# Altium PCB o_core_v1.PcbDoc (part 1 of 2)
Units mm, origin at the board's own origin, x right, y up, seen from the top; angles counter-clockwise.
Board outline 104 x 81 mm, 4 copper layers (Top Layer, GND_Layer, MidLayer2, Bottom Layer); 166 components, 151 nets, 748 pads, 250 vias.
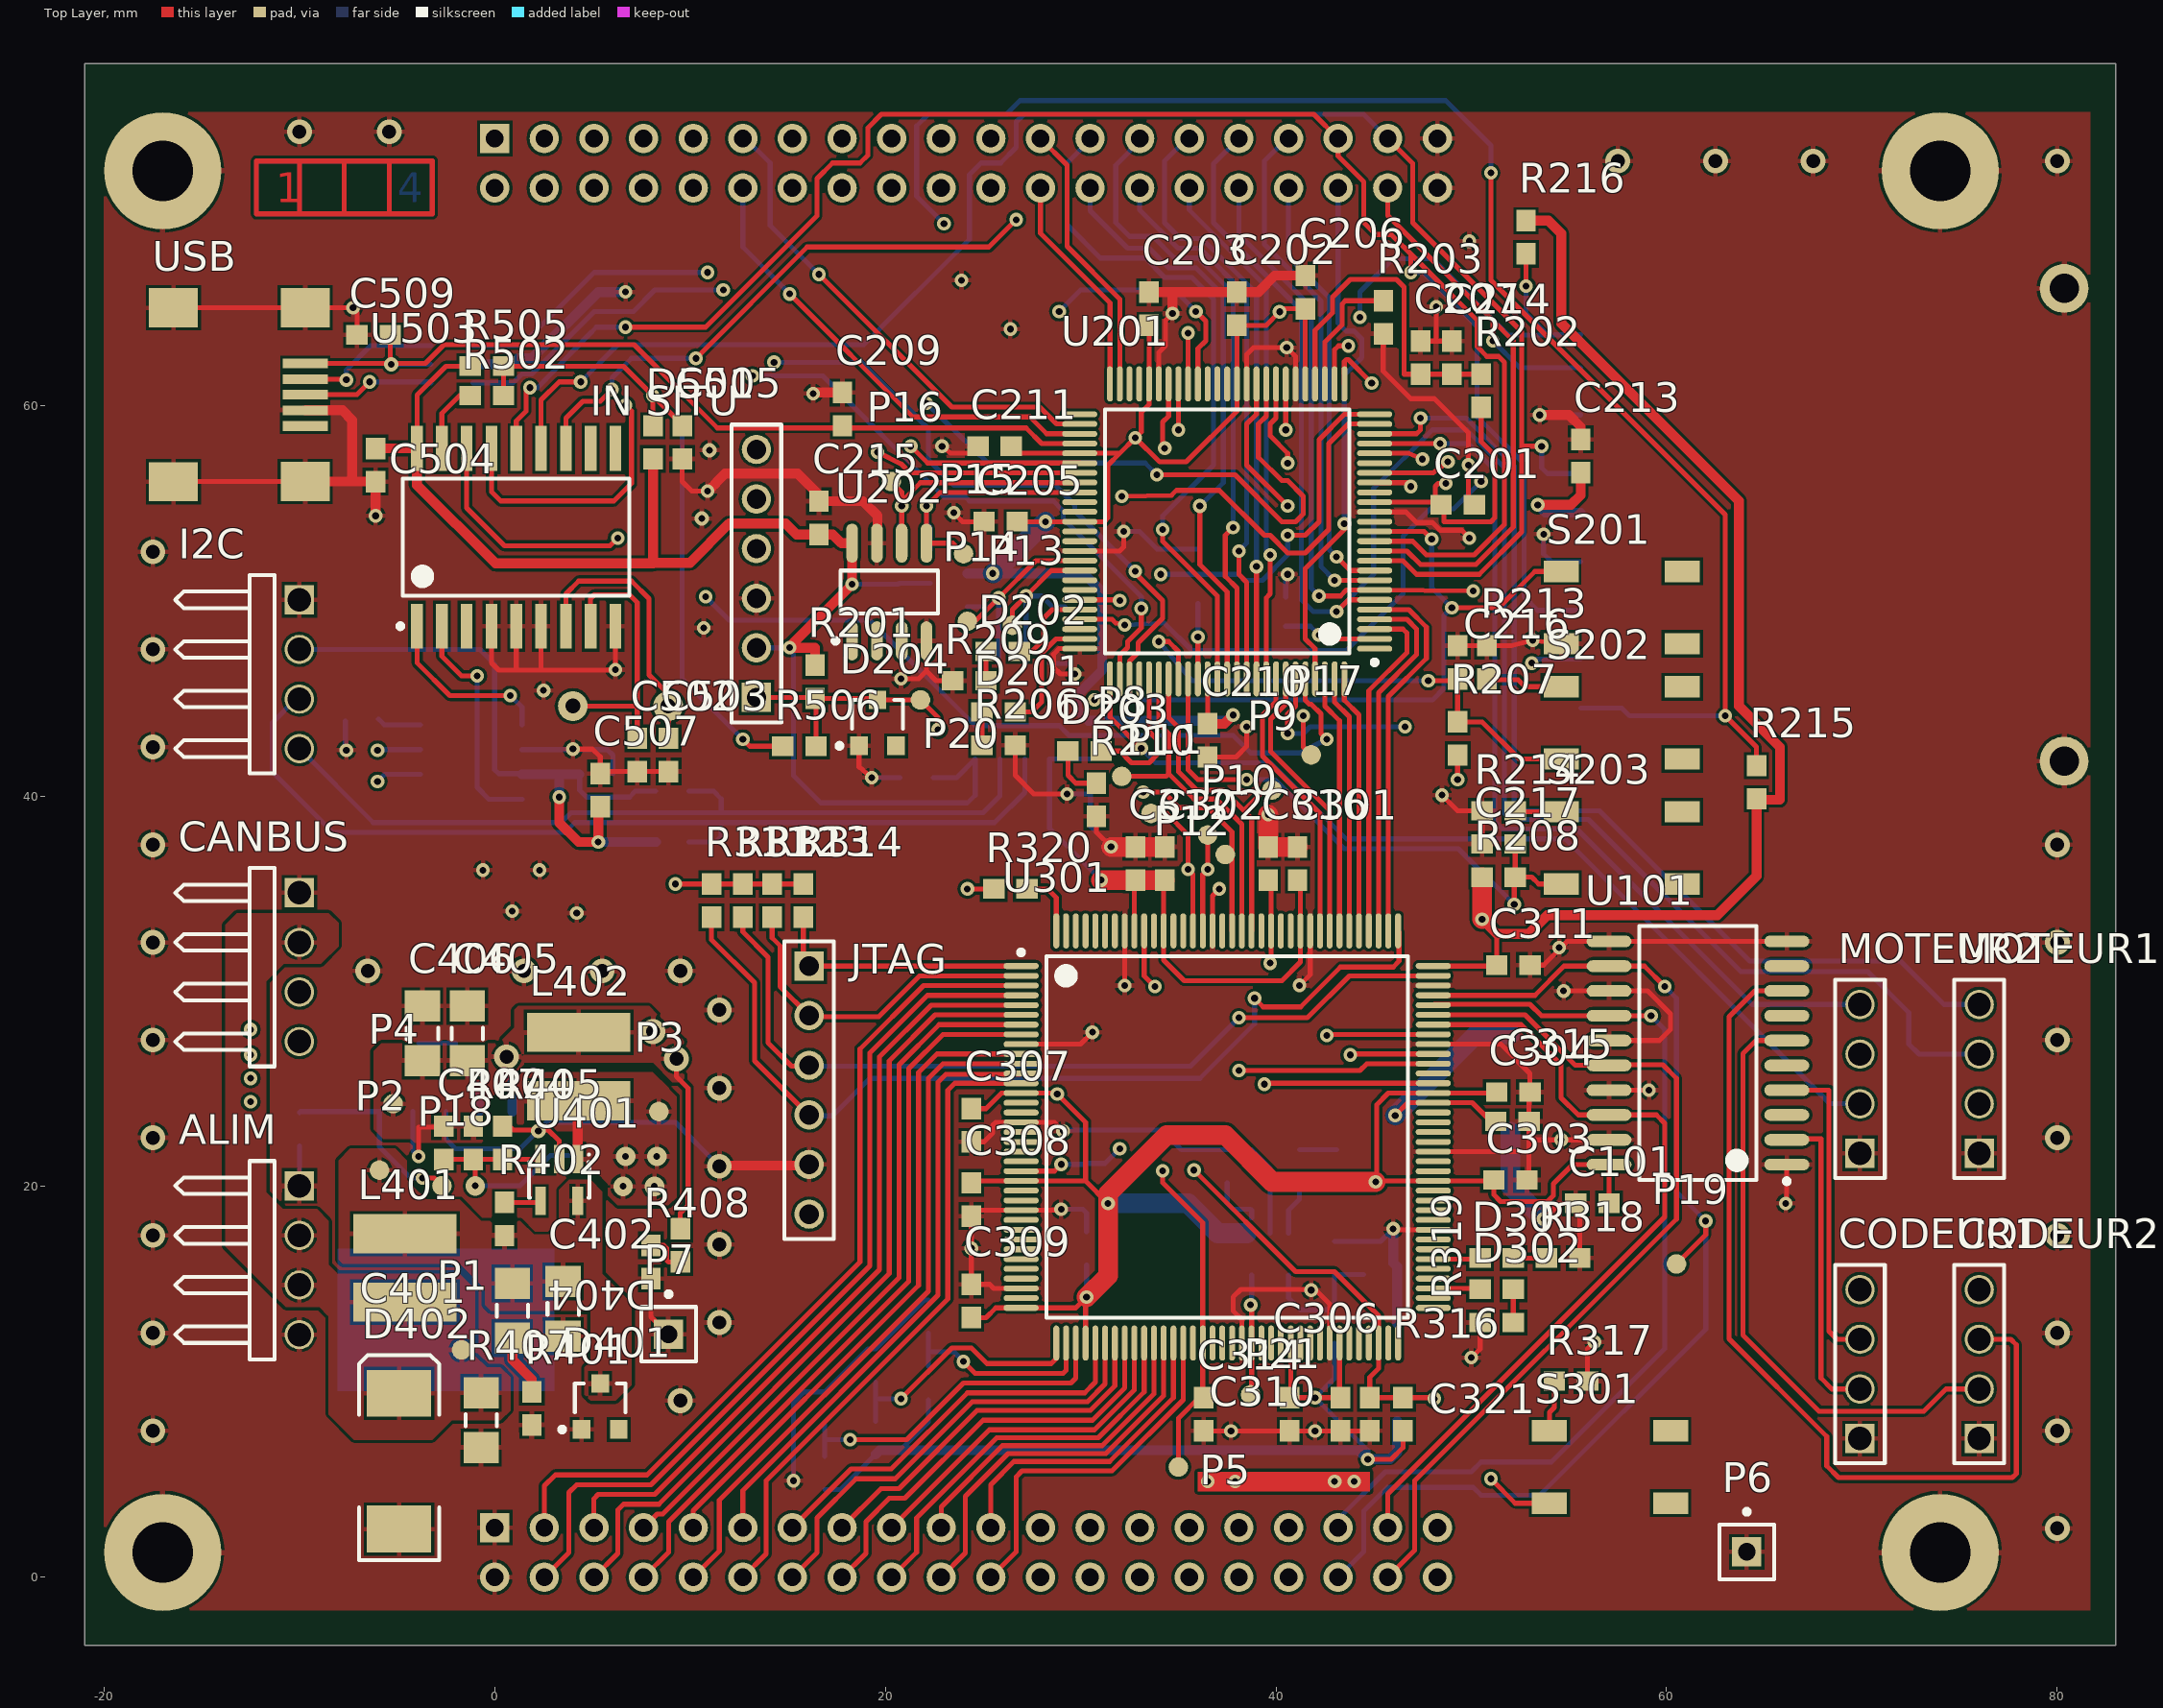
[diagram p0: Top Layer view]
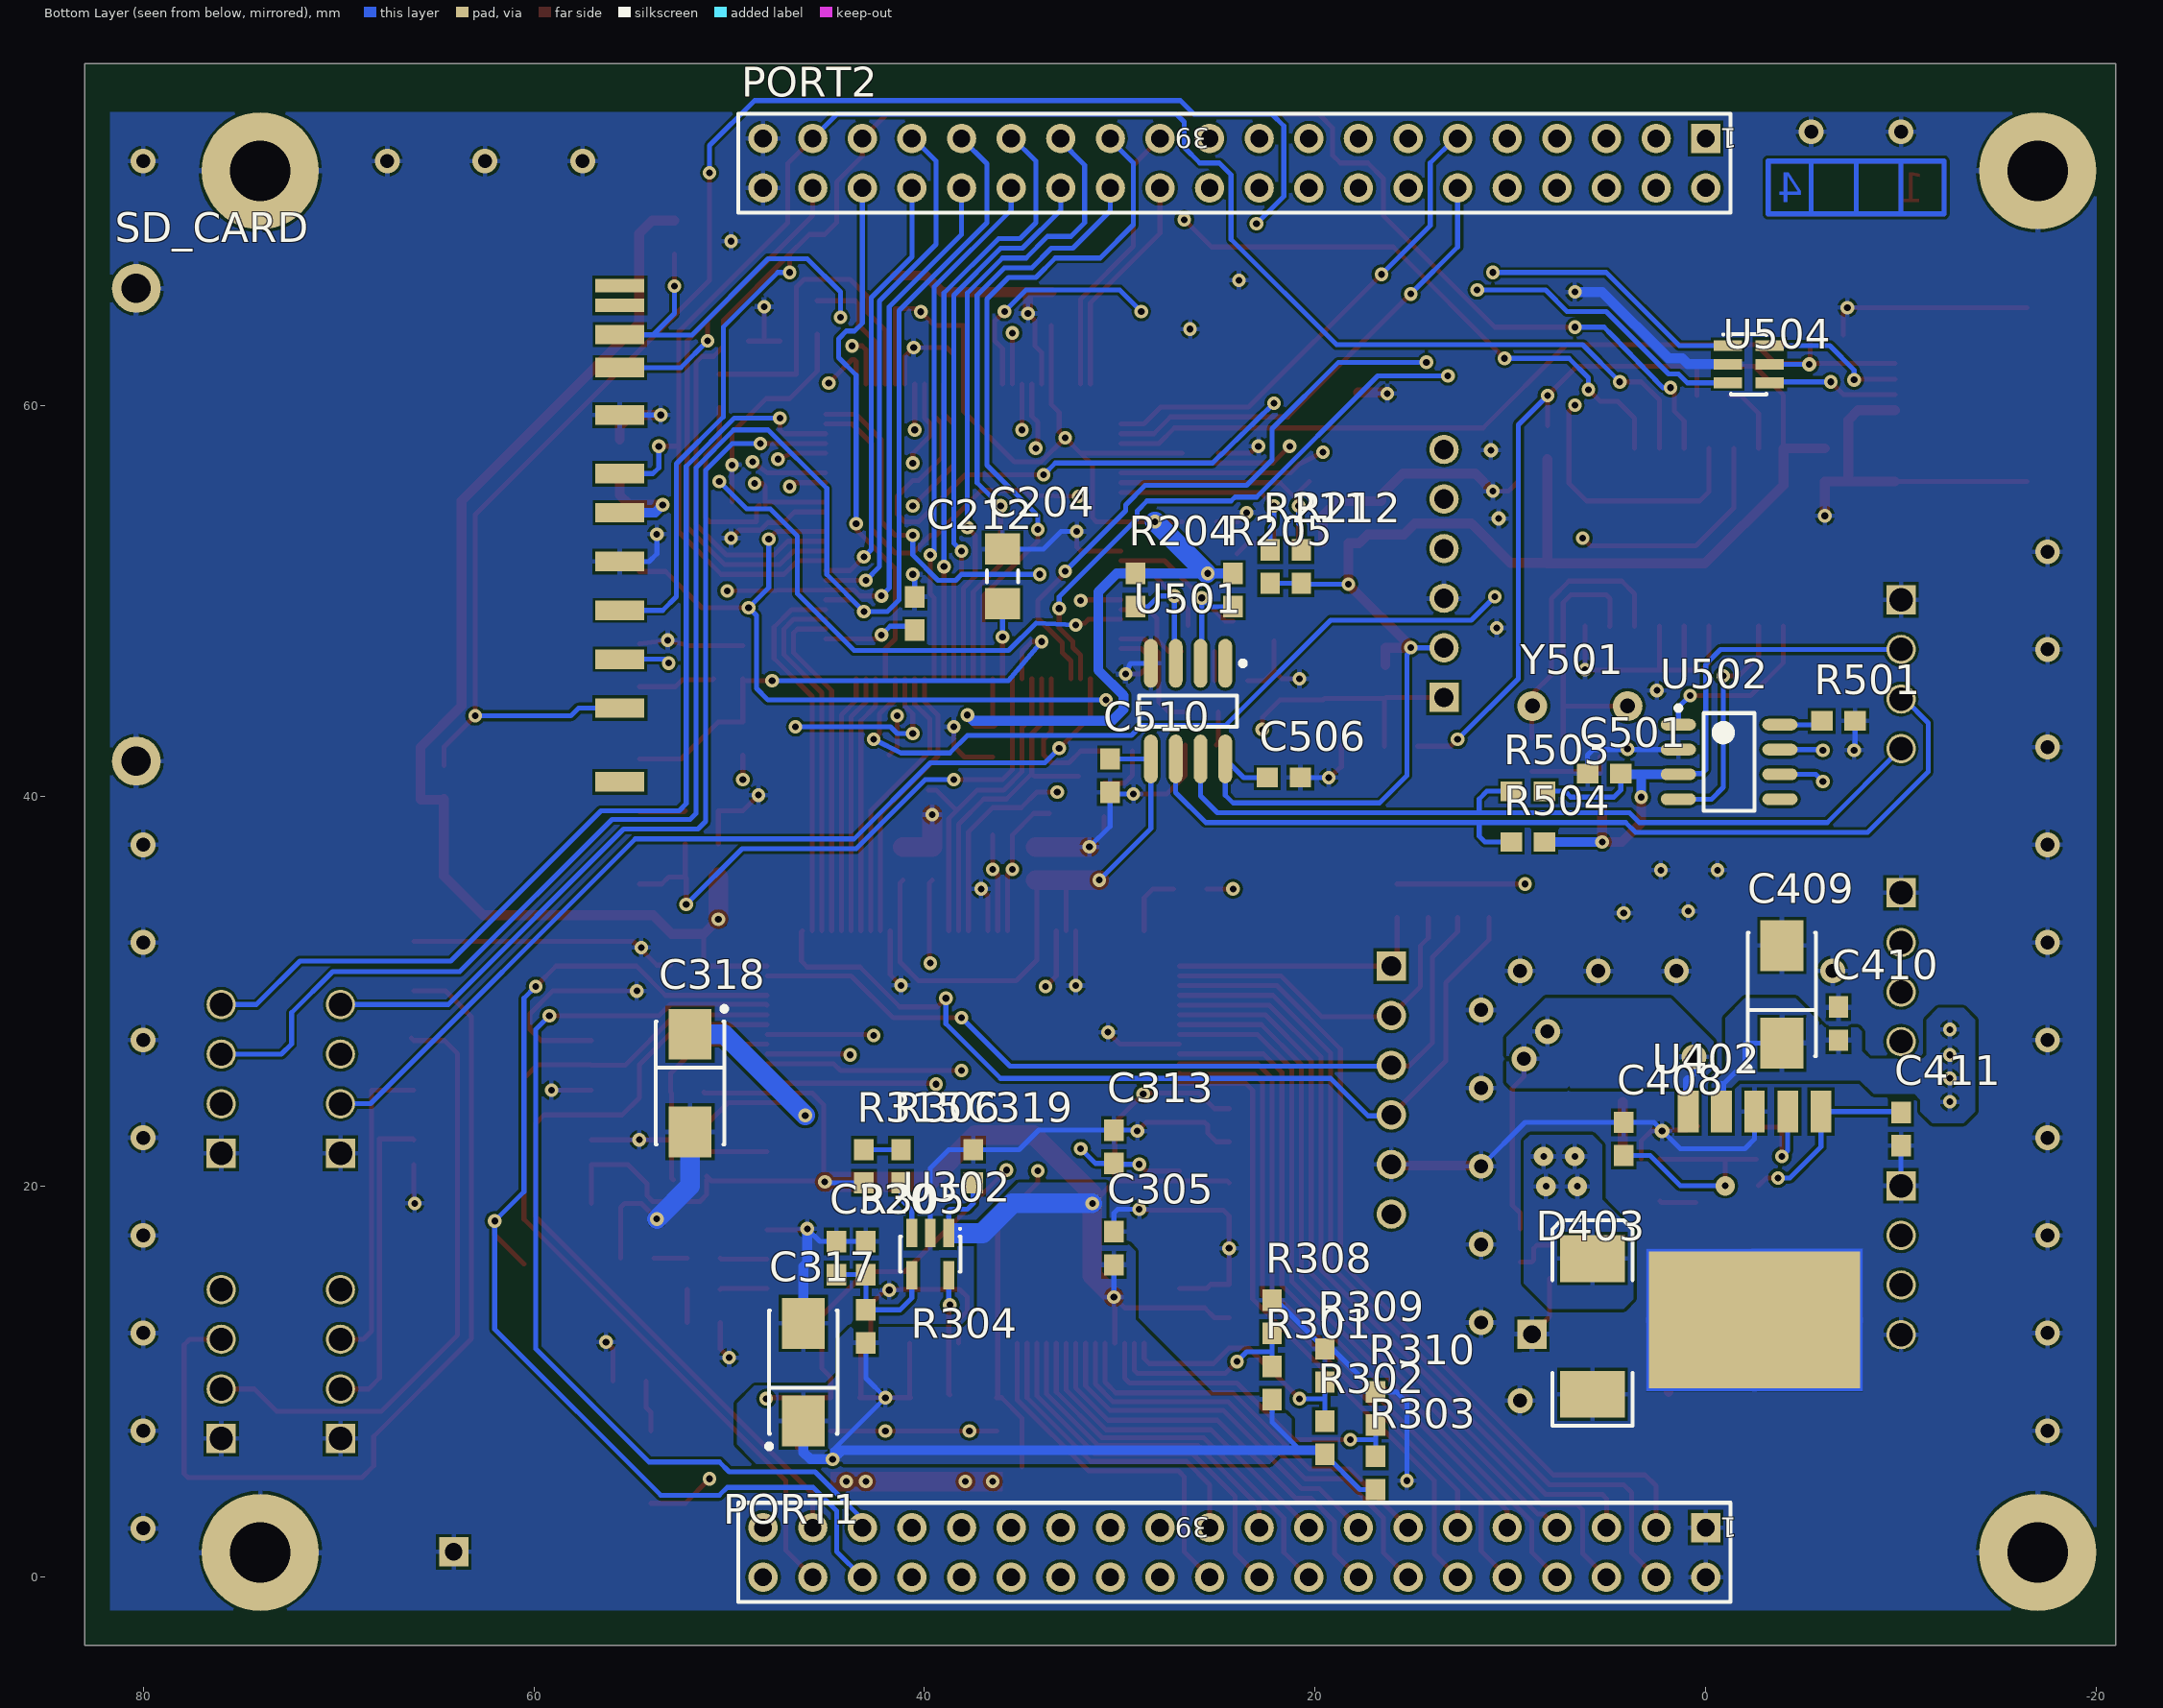
[diagram p1: Bottom Layer view, seen from below]
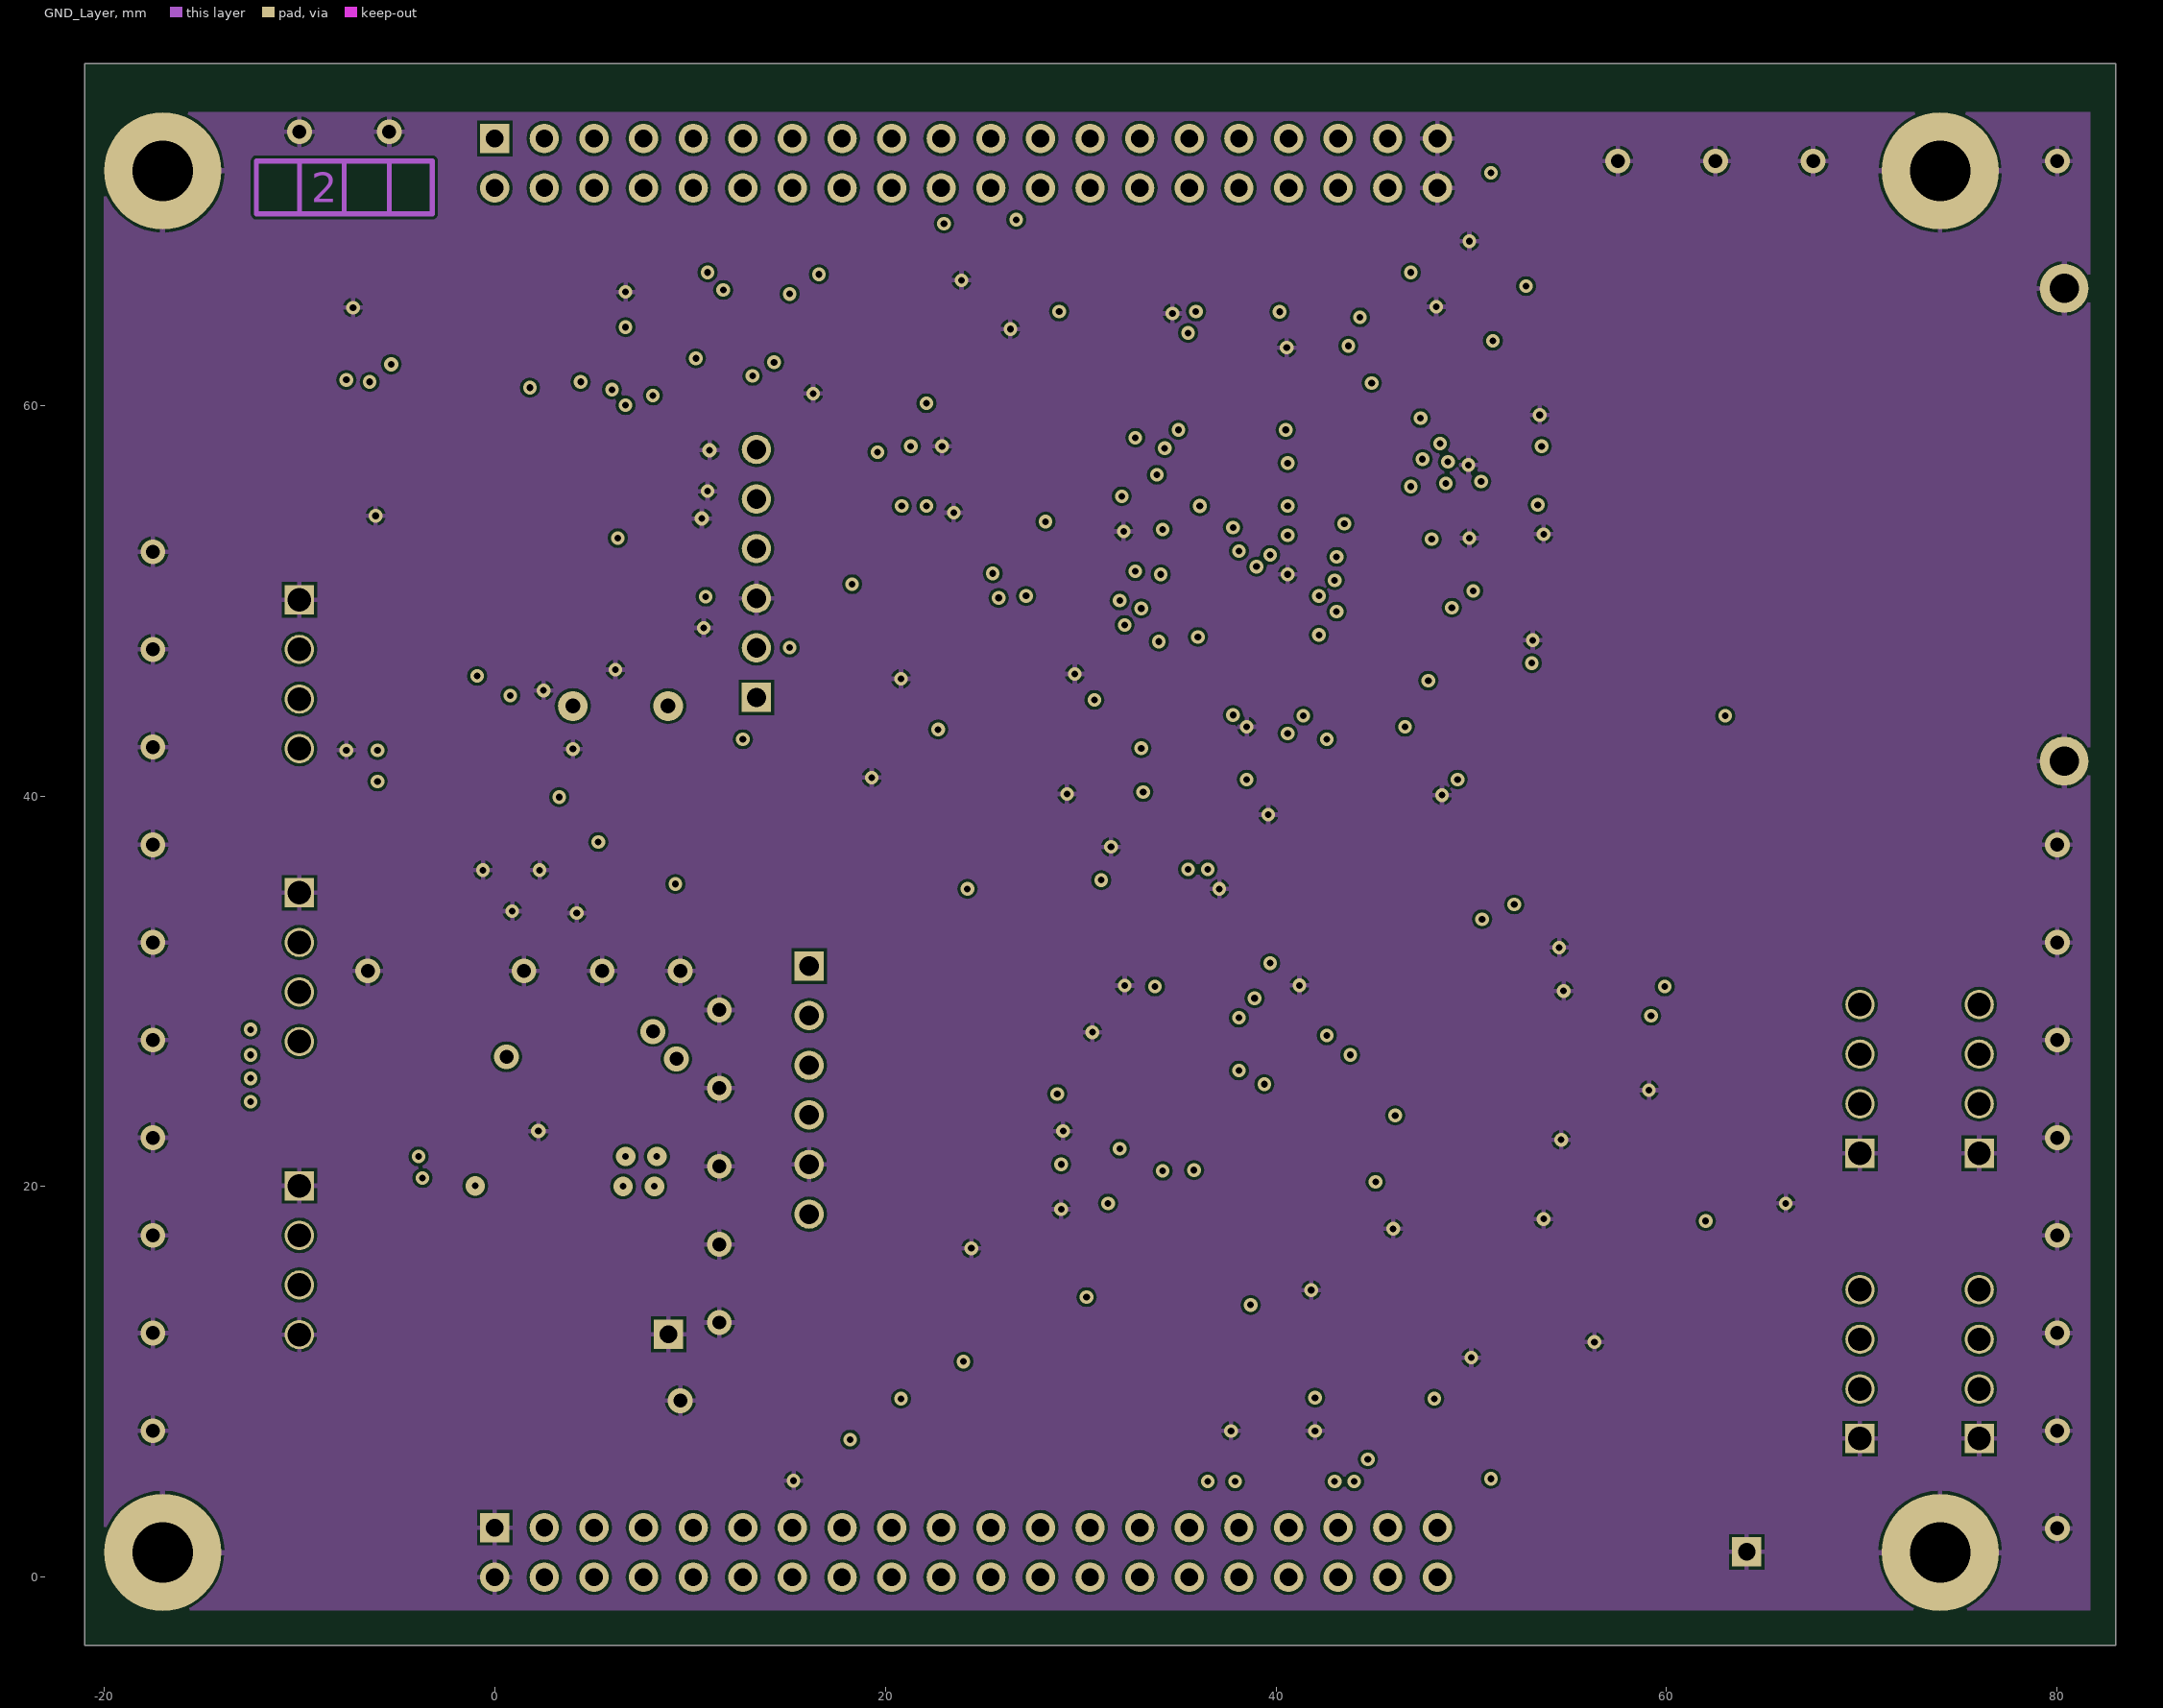
[diagram p2: GND_Layer]
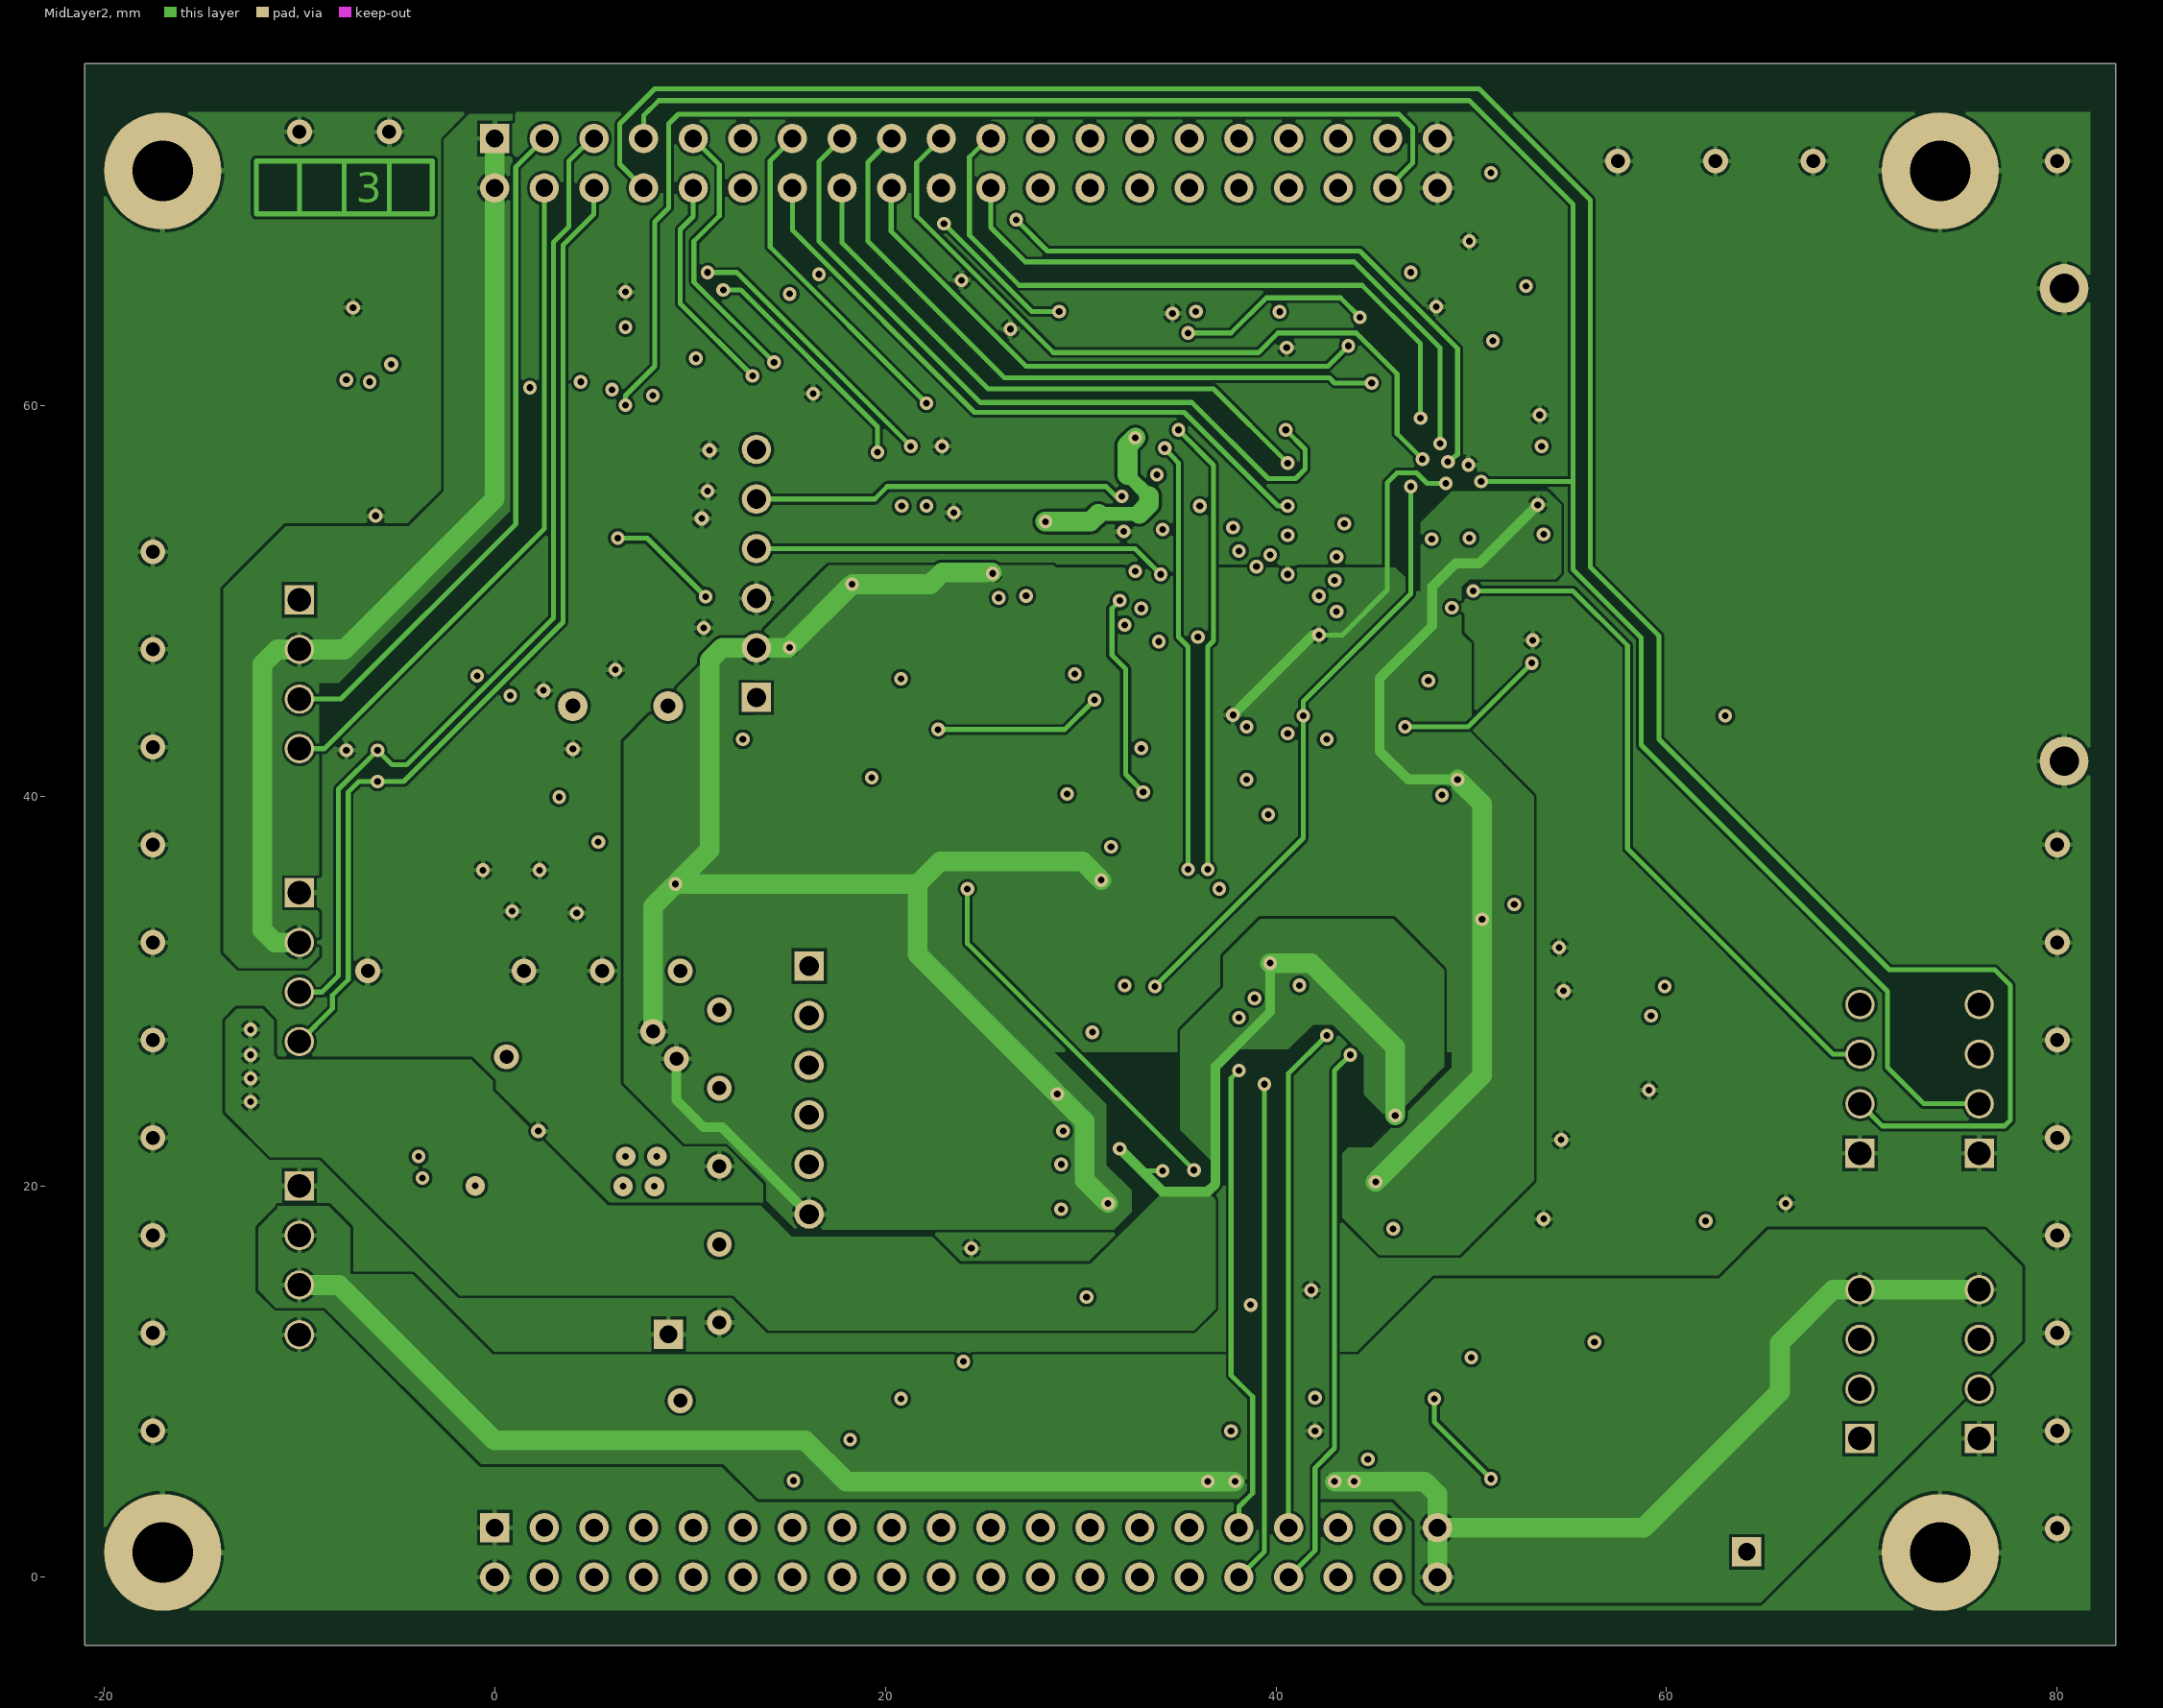
[diagram p3: MidLayer2]

## Layer stack, top to bottom
Top Layer: signal copper 0.0356
Dielectric: core 0.32, FR-4, Dk 4.8
GND_Layer: signal copper 0.0356
Dielectric: prepreg 0.32, FR-4, Dk 4.8
MidLayer2: signal copper 0.0356
Dielectric: core 0.32, FR-4, Dk 4.8
Bottom Layer: signal copper 0.0356

## Board outline
83,-3.5 83,77.5 -21,77.5 -21,-3.5

## Design rules (kind name [scope] priority, off if disabled: settings)
Clearance [All] p1: gap=0.15
HoleSize [All] p1: absolutevalues=TRUE maxlimit=6 minlimit=0.34 maxpercent=80.000 minpercent=20.000
PlaneClearance [All] p1: clearance=0.254
PlaneConnect [All] p1: planeconnectstyle=Relief reliefexpansion=0.508 reliefentries=4 reliefconductorwidth=0.254 reliefairgap=0.128
PolygonConnect [All] p1: connectstyle=Relief reliefconductorwidth=0.254 reliefentries=4 polygonreliefangle="90 Angle"
RoomDefinition CONNECTS [InComponentClass('CONNECTS')] p1: confinementstyle=ConfineIn formatcopy=TRUE lockcomponents=FALSE outline -21,-3.5 83,-3.5 83,77.5 -21,77.5
RoomDefinition FPGA [InComponentClass('FPGA')] p2: confinementstyle=ConfineIn formatcopy=TRUE lockcomponents=FALSE outline 9.1,-4.66 74.7,-4.66 74.7,43.34 9.1,43.34
RoomDefinition PIC32 [InComponentClass('PIC32')] p3: confinementstyle=ConfineIn formatcopy=TRUE lockcomponents=FALSE outline -5,24.04 84.1,24.04 84.1,72.54 -5,72.54
RoomDefinition POWER_SUPPLY [InComponentClass('POWER_SUPPLY')] p4: confinementstyle=ConfineIn formatcopy=TRUE lockcomponents=FALSE outline 77.7,76.7 -20.2,76.7 -20.2,-3 77.7,-3
RoomDefinition SERIAL_INTERFACES [InComponentClass('SERIAL_INTERFACES')] p5: confinementstyle=ConfineIn formatcopy=TRUE lockcomponents=FALSE outline -20.5,36.94 81.5,36.94 81.5,75.5 -20.5,75.5
RoutingVias [All] p1: holewidth=0.35 width=1 viastyle="Through Hole" minholewidth=0.3 minwidth=0.6 maxholewidth=6 maxwidth=1.27
SolderMaskExpansion [All] p1: expansion=0.102
TestPointUsage [All] p1: valid=0 allowmultiple=FALSE
Testpoint [All] p1: side=15 testpointundercomponent=TRUE minsize=1.016 maxsize=2.54 preferedsize=1.524 minholesize=0 maxholesize=1.016 preferedholesize=0.813 testpointgrid=0.025 style=1023 order=0123456789
Width [All] p1: maxlimit=1.024 minlimit=0.15 preferedwidth=0.254
16 further rules are at their usual default settings.

## Classes and differential pairs
component class SERIAL_INTERFACES: C501 C502 C503 C504 C505 C506 C507 C509 C510 D501 P13 P14 R501 R502 R503 R504 R505 R506 U501 U502 U503 U504 USB Y501
component class POWER_SUPPLY: C401 C402 C405 C406 C407 C408 C409 C410 C411 D401 D402 D403 D404 L401 L402 P1 P2 P3 P4 P5 P6 P7 P18 R401 R402 R404 R405 R407 R408 U401 U402
component class PIC32: C201 C202 C203 C204 C205 C206 C207 C209 C210 C211 C212 C213 C214 C215 C216 C217 D201 D202 D203 D204 "IN SITU" P8 P9 P10 P11 P12 P15 P16 P17 P20 R201 R202 R203 R204 R205 R206 R207 R208 R209 R210 R211 R212 R213 R214 R215 R216 S201 S202 S203 SD_CARD U201 U202
component class FPGA: C301 C302 C303 C304 C305 C306 C307 C308 C309 C310 C311 C312 C313 C314 C315 C316 C317 C318 C319 C320 C321 D301 D302 JTAG P21 R301 R302 R303 R304 R305 R306 R308 R309 R310 R311 R312 R313 R314 R315 R316 R317 R318 R319 R320 S301 U301 U302
component class CONNECTS: ALIM C101 CANBUS CODEUR1 CODEUR2 I2C MOTEUR1 MOTEUR2 P19 PORT1 PORT2 U101

## Components (designator, comment, footprint, x,y, rotation, side; value= is the part's Value field where it differs from the comment)
ALIM "Header 4H" HDR1X4H -10,20.04 r270 top
C101 "100n cap 0603 X7R 25V" 1608[0603] 56.2,19.14 r180 top
C201 "100n cap 0603 X7R 25V" 1608[0603] 49.3,54.9 r180 top
C202 "100n cap 0603 X7R 25V" 1608[0603] 38,64.94 r270 top
C203 "100n cap 0603 X7R 25V" 1608[0603] 33.5,64.94 r270 top
C204 "10u cap X7R 1206 10V" 3216[1206] 36,51.24 r90 bottom
C205 "100n cap 0603 X7R 25V" 1608[0603] 25.9,54.04 r180 top
C206 "100n cap 0603 X7R 25V" 1608[0603] 41.5,65.79 r270 top
C207 "100n cap 0603 X7R 25V" 1608[0603] 47.4,62.44 r270 top
C209 "100n cap 0603 X7R 25V" 1608[0603] 17.8,59.8 r90 top
C210 "100n cap 0603 X7R 25V" 1608[0603] 36.5,42.84 r270 top
C211 "100n cap 0603 X7R 25V" 1608[0603] 25.6,57.9 r180 top
C212 "100n cap 0603 X7R 25V" 1608[0603] 40.5,49.34 r270 bottom
C213 "100n cap 0603 X7R 25V" 1608[0603] 55.6,57.4 r270 top
C214 "10n cap 0603 X7R 25V" 1608[0603] 49,62.44 r270 top
C215 "100n cap 0603 X7R 25V" 1608[0603] 16.6,54.24 r90 top
C216 "100p cap 0603 X7R 25V" 1608[0603] 49.3,46.84 r270 top
C217 "100n cap 0603 X7R 25V" 1608[0603] 51.4,37.54 r0 top
C301 "100n cap 0603 X7R 25V" 1608[0603] 41.1,36.54 r270 top
C302 "100n cap 0603 X7R 25V" 1608[0603] 34.3,36.54 r270 top
C303 "100n cap 0603 X7R 25V" 1608[0603] 52,20.34 r180 top
C304 "100n cap 0603 X7R 25V" 1608[0603] 52.15,24.84 r180 top
C305 "100n cap 0603 X7R 25V" 1608[0603] 30.3,16.84 r270 bottom
C306 "100n cap 0603 X7R 25V" 1608[0603] 40.7,8.34 r90 top
C307 "100n cap 0603 X7R 25V" 1608[0603] 24.4,23.14 r90 top
C308 "100n cap 0603 X7R 25V" 1608[0603] 24.4,19.34 r90 top
C309 "100n cap 0603 X7R 25V" 1608[0603] 24.4,14.14 r270 top
C310 "100n cap 0603 X7R 25V" 1608[0603] 43.3,8.34 r90 top
C311 "100n cap 0603 X7R 25V" 1608[0603] 52.15,31.34 r180 top
C312 "100n cap 0603 X7R 25V" 1608[0603] 32.8,36.54 r270 top
C313 "100n cap 0603 X7R 25V" 1608[0603] 30.3,22.04 r270 bottom
C314 "100n cap 0603 X7R 25V" 1608[0603] 36.3,8.34 r90 top
C315 "100n cap 0603 X7R 25V" 1608[0603] 52.1,23.34 r180 top
C316 "100n cap 0603 X7R 25V" 1608[0603] 39.6,36.54 r270 top
C317 "10u cap Bcase Tantale 20V" 6032 46.2,10.5 r90 bottom
C318 "10u cap Bcase Tantale 20V" 6032 52,25.3 r270 bottom
C319 "100n cap 0603 X7R 25V" 1608[0603] 37.5,21.04 r90 bottom
C320 "100n cap 0603 X7R 25V" 1608[0603] 44.5,16.34 r270 bottom
C321 "100p cap 0603 X7R 25V" 1608[0603] 44.8,8.34 r90 top
C401 "10u cap X7R 1206 10V" 3216[1206] 0.9,13.64 r90 top
C402 "10u cap X7R 1206 10V" 3216[1206] 3.5,13.74 r90 top
C405 "10u cap X7R 1206 10V" 3216[1206] -1.4,27.84 r270 top
C406 "10u cap X7R 1206 10V" 3216[1206] -3.7,27.84 r270 top
C407 "100p cap 0603 X7R 25V" 1608[0603] -2.6,22.24 r90 top
C408 "100p cap 0603 X7R 25V" 1608[0603] 4.2,22.44 r270 bottom
C409 "10u cap Bcase Tantale 20V" 6032 -3.9,29.84 r90 bottom
C410 "100n cap 0603 X7R 25V" 1608[0603] -6.8,28.34 r270 bottom
C411 "100n cap 0603 X7R 25V" 1608[0603] -10,22.94 r90 bottom
C501 "100n cap 0603 X7R 25V" 1608[0603] 5.2,41.14 r0 bottom
C502 "15p cap 0603 X7R 25V" 1608[0603] 7.3,42.1 r90 top
C503 "15p cap 0603 X7R 25V" 1608[0603] 8.9,42.1 r90 top
C504 "100n cap 0603 X7R 25V" 1608[0603] -6.1,56.94 r270 top
C505 "100p cap 0603 X7R 25V" 1608[0603] 9.6,58.1 r270 top
C506 "100n cap 0603 X7R 25V" 1608[0603] 21.6,40.94 r180 bottom
C507 "100n cap 0603 X7R 25V" 1608[0603] 5.4,40.3 r270 top
C509 "100n cap 0603 X7R 25V" 1608[0603] -6.2,63.6 r180 top
C510 "100n cap 0603 X7R 25V" 1608[0603] 30.5,41.04 r90 bottom
CANBUS "Header 4H" HDR1X4H -10,35.04 r270 top
CODEUR1 "Header 4" HDR1X4 69.9,7.1 r90 top
CODEUR2 "Header 4" HDR1X4 76,7.1 r90 top
D201 "LED" 1608[0603] 25.8,44.3 r180 top
D202 "LED" 1608[0603] 26,47.4 r180 top
D203 "LED" 1608[0603] 30.2,42.3 r180 top
D204 "BZX84C5V6" 318-07 19.6,43.74 r0 top
D301 "LED" 1608[0603] 51.3,16.34 r0 top
D302 "LED" 1608[0603] 51.3,14.74 r0 top
D401 "BZX84C5V6" 318-07 5.4,8.74 r0 top
D402 "Diode MBRS340" SMC -4.9,5.94 r90 top
D403 "Diode MBRS340" SMC 5.8,12.84 r90 bottom
D404 "LED" 1608[0603] 9.5,16.99 r270 top
D501 "Diode 1N4448" 1608[0603] 8.1,58.1 r270 top
I2C "Header 4H" HDR1X4H -10,50.04 r270 top
"IN SITU" "Header 6" HDR1X6 13.4,45.04 r90 top
JTAG "Header 6" HDR1X6 16.1,31.29 r270 top
L401 "Inductor WURTH 4.7U 744043004" 744043004 -4.6,15.84 r180 top
L402 "Inductor WURTH 4.7U 744043004" 744043004 4.3,26.14 r180 top
MOTEUR1 "Header 4" HDR1X4 76,21.7 r90 top
MOTEUR2 "Header 4" HDR1X4 69.9,21.7 r90 top
P1 "TEST" TP1#1 -1.7,11.64 r0 top locked
P2 "TEST" TP1#1 -5.9,20.84 r0 top
P3 "TEST" TP1#1 8.4,23.84 r0 top
P4 "TEST" TP1#1 -5.2,24.24 r0 top
P5 "TEST" TP1#2 49.9,23.04 r0 top
P6 "TEST" PIN1 64.1,1.3 r0 top
P7 "TEST" PIN1 8.9,12.44 r0 top
P8 "TEST" TP1#1 32.1,41 r0 top
P9 "TEST" TP1#1 39.8,40.3 r0 top
P10 "TEST" TP1#1 37.4,37 r0 top
P11 "TEST" TP1#1 33.6,39.1 r0 top
P12 "TEST" TP1#3 35,34.9 r0 top locked
P13 "TEST" TP1#1 26.5,48.74 r0 top
P14 "TEST" TP1#1 24.2,48.94 r0 top locked
P15 "TEST" TP1#1 24,52.4 r0 top
P16 "TEST" TP1#1 20.3,56.1 r0 top
P17 "TEST" TP1#1 41.8,42.1 r0 top
P18 "TEST" TP1#1 -2.7,20.04 r0 top
P19 "TEST" TP1#1 60.5,16.04 r0 top
P20 "TEST" TP1#4 480,65.04 r0 top locked
P21 "TEST" TP1#1 38.7,9.34 r90 top
PORT1 "Header 20X2" HDR2X20 0,2.54 r0 bottom
PORT2 "Header 20X2" HDR2X20 0,73.66 r0 bottom
R201 "Res 10k 100mW" 1608[0603] 16.4,45.84 r90 top
R202 "Res 10 100mW" 1608[0603] 50.5,60.74 r270 top
R203 "Res 10 100mW" 1608[0603] 45.5,64.5 r90 top
R204 "Res 10k 100mW" 1608[0603] 29.2,50.54 r90 bottom
R205 "Res 10k 100mW" 1608[0603] 24.2,50.54 r90 bottom
R206 "Res 680 250mW" 1608[0603] 25.8,42.6 r0 top
R207 "Res 10k 100mW" 1608[0603] 49.3,42.94 r270 top
R208 "Res 10k 100mW" 1608[0603] 51.4,35.84 r180 top
R209 "Res 680 250mW" 1608[0603] 24.3,45.9 r180 top
R210 "Res 680 250mW" 1608[0603] 30.8,39.8 r270 top
R211 "Res 10k 100mW" 1608[0603] 22.3,51.74 r270 bottom
R212 "Res 10k 100mW" 1608[0603] 20.7,51.74 r270 bottom
R213 "Res 10 100mW" 1608[0603] 50.8,46.84 r270 top
R214 "Res 10 100mW" 1608[0603] 51.4,39.24 r0 top
R215 "Res 10k 100mW" 1608[0603] 64.6,40.7 r270 top
R216 "Res 10k 100mW" 1608[0603] 52.8,68.6 r90 top
R301 "Res 10k 100mW" 1608[0603] 22.2,9.94 r270 bottom
R302 "Res 10k 100mW" 1608[0603] 19.5,7.14 r270 bottom
R303 "Res 10k 100mW" 1608[0603] 16.9,5.34 r270 bottom
R304 "Res 10k 100mW" 1608[0603] 43,12.84 r270 bottom
R305 "Res 10k 100mW" 1608[0603] 43,16.34 r90 bottom
R306 "Res 10k 100mW" 1608[0603] 41.2,21.04 r270 bottom
R308 "Res 10k 100mW" 1608[0603] 22.2,13.34 r270 bottom
R309 "Res 10k 100mW" 1608[0603] 19.5,10.84 r270 bottom
R310 "Res 10k 100mW" 1608[0603] 16.9,8.64 r270 bottom
R311 "Res 10k 100mW" 1608[0603] 11.1,34.64 r270 top
R312 "Res 10k 100mW" 1608[0603] 12.7,34.64 r270 top
R313 "Res 10k 100mW" 1608[0603] 14.2,34.64 r270 top
R314 "Res 10k 100mW" 1608[0603] 15.8,34.64 r270 top
R315 "Res 33k 100mW" 1608[0603] 43.1,21.04 r90 bottom
R316 "Res 10k 100mW" 1608[0603] 46.5,8.34 r270 top
R317 "Res 10 100mW" 1608[0603] 55.1,10.04 r180 top
R318 "Res 680 250mW" 1608[0603] 54.7,16.34 r0 top
R319 "Res 680 250mW" 1608[0603] 51.3,13.04 r180 top
R320 "Res 0 100mW" 1608[0603] 26.4,35.24 r0 top
R401 "Res 0.5 100mW" 1608[0603] 1.9,8.64 r90 top
R402 "Res 10k 100mW" 1608[0603] 0.5,18.34 r90 top
R404 "Res 45k 100mW" 1608[0603] -1.1,22.24 r90 top
R405 "Res 10k 100mW" 1608[0603] 0.4,22.24 r270 top
R407 "Res 560k 250mW" 3216[1206] -0.7,8.04 r90 top
R408 "Res 680 250mW" 1608[0603] 8,16.14 r90 top
R501 "Res 10k 100mW" 1608[0603] -6.8,43.84 r0 bottom
R502 "Res 10k 100mW" 1608[0603] -0.4,60.5 r0 top
R503 "Res 10k 100mW" 1608[0603] 9.1,40.24 r180 bottom
R504 "Res 10k 100mW" 1608[0603] 9.1,37.64 r180 bottom
R505 "Res 10k 100mW" 1608[0603] -0.4,62 r180 top
R506 "Res 0 100mW" 1608[0603] 15.6,42.54 r180 top
S201 "SW-PB" BP1 57.7,49.64 r0 top
S202 "SW-PB" BP1 57.7,43.74 r0 top
S203 "SW-PB" BP1 57.7,37.34 r0 top
S301 "SW-PB" BP1 57.1,5.64 r0 top
SD_CARD "SD CARD" SDHolder 55.6,44.5 r0 bottom
U101 "SN74LVC244ADW" DW020_N 61.6,26.84 r180 top
U201 "PIC32MX4XXL" TQFP100_N 37.5,53.54 r180 top
U202 "M24C16-WMN6" SOP8_N 20.2,50.44 r90 top
U301 "XC3S50AN-4TQG144C" TQG144_N 37.5,22.54 r0 top
U302 "LTC6905" S5 39.7,16.54 r0 bottom
U401 "LM2830Z" DBV005 3.3,20.34 r180 top
U402 "LP38858S-1.2" TO263-5Lead -2.5,23.84 r90 bottom
U501 "PCA9515" 751-02_M 26.5,44.34 r270 bottom
U502 "MCP2551" SOIC150-8_N -1.2,41.74 r180 bottom
U503 "MCP2515" SOIC127P1030X265-18N 1.1,53.24 r90 top
U504 "USBLC6-2" SOT23-6 -2.2,62.1 r270 bottom
USB "0481900001" USB -9.7,60.54 r0 top
Y501 "AS-20.000-18SMDT" HC49/S 4,44.6 r0 bottom

## Footprints (in the part's own frame and the unit in brackets; to place one, negate y for a bottom-side part, rotate by r counter-clockwise, add the part's x,y. Pads: shape width x height; smd on the part's side, far side on the other; paste and mask are expansions set on the pad)
318-07 [mm] "SOT-23; 3 Leads; Body 3.0 x 2.5 mm, inc. leads (LxW max)"
  rect 0.9x0.95 smd: 1(-0.95,-1.175) 2(0.95,-1.175) 3(0,1.175)
  silkscreen extent -2.07,-1.3 1.3,1.18
751-02_M [mm] "SOIC, 8-Leads, Body 4.9x3.9mm, Pitch 1.27mm, IPC Low Density"
  oval 2.5x0.7 smd: 1(-2.45,1.905) 2(-2.45,0.635) 3(-2.45,-0.635) 4(-2.45,-1.905) 5(2.45,-1.905) 6(2.45,-0.635) 7(2.45,0.635) 8(2.45,1.905)
  silkscreen extent -2.57,-2.5 0.8,2.93, body extent -2,-2.5 2,2.5, height 1.75
1608[0603] [mm] "Chip Capacitor; Body 1.6 x 0.8 mm (LxW typ)"
  rect 1.1x1 smd: 1(-0.85,0) 2(0.85,0)
3216[1206] [mm] "Chip Resistor; Body 3.2 x 1.6 mm (LxW typ)"
  rect 1.6x1.8 smd: 1(-1.4,0) 2(1.4,0)
  silkscreen extent -0.3,-0.8 0.3,0.8
6032 [mm] "Capacitor, SM Tantalum; Body 6.0 x 3.2 mm (LxW typ)"
  rect 2.6x2.2 smd: 1(-2.5,0) 2(2.5,0)
  silkscreen extent -3.92,-1.75 3.15,1.88
744043004 [mm] "744043004 inductor"
  rect 5.3x2 smd: 1(0,1.75) 2(0,-1.75)
BP1 [mm] "SMT Push Button"
  rect 1.8x1.1 smd: 1(-3.1,1.85) 2(3.1,1.85) 3(-3.1,-1.85) 4(3.1,-1.85)
DBV005 [mm] "SOT-23/SC-74A; 5 Leads; Body 3 x 3 mm, inc. leads (LxW max)"
  rect 0.55x1.45 smd: 1(-0.95,-1.075) 2(0,-1.075) 3(0.95,-1.075) 4(0.95,1.075) 5(-0.95,1.075)
  silkscreen extent -1.58,-1.35 1.55,0.9
DW020_N [mm] "SOIC, 20-Leads, Body 12.8x7.5mm, Pitch 1.27mm, IPC Medium Density"
  oval 2.3x0.6 smd: 1(-4.55,5.715) 2(-4.55,4.445) 3(-4.55,3.175) 4(-4.55,1.905) 5(-4.55,0.635) 6(-4.55,-0.635) 7(-4.55,-1.905) 8(-4.55,-3.175) 9(-4.55,-4.445) 10(-4.55,-5.715) 11(4.55,-5.715) 12(4.55,-4.445) 13(4.55,-3.175) 14(4.55,-1.905) 15(4.55,-0.635) 16(4.55,0.635) 17(4.55,1.905) 18(4.55,3.175) 19(4.55,4.445) 20(4.55,5.715)
  silkscreen extent -4.67,-6.5 3,6.69, body extent -3.75,-6.5 3.75,6.5, height 2.65
HC49/S [mil] "Quartz"
  round 60 hole 30: 1(0,0) 2(192.13,0)
HDR1X4 [mm] "Connector; Header; 4 Position"
  rect 1.5x1.5 hole 1.2: 1(0,0)
  round 1.5 hole 1.2: 2(2.54,0) 3(5.08,0) 4(7.62,0)
  silkscreen extent -1.27,-1.27 8.89,1.27
HDR1X4H [mm] "Connector; Header; 4 Position; Right Angle"
  rect 1.5x1.5 hole 1.2: 1(0,0)
  round 1.5 hole 1.2: 2(2.54,0) 3(5.08,0) 4(7.62,0)
  silkscreen extent -1.27,-6.35 8.89,-1.27
HDR1X6 [mm] "Connector; Header; 6 Position"
  rect 1.5x1.5 hole 1: 1(0,0)
  round 1.5 hole 1: 2(2.54,0) 3(5.08,0) 4(7.62,0) 5(10.16,0) 6(12.7,0)
  silkscreen extent -1.27,-1.27 13.97,1.27
HDR2X20 [mm] "Connector; Header; 20x2 Position"
  rect 1.5x1.5 hole 0.9: 1(0,0)
  round 1.5 hole 0.9: 2(0,2.54) 3(2.54,0) 4(2.54,2.54) 5(5.08,0) 6(5.08,2.54) 7(7.62,0) 8(7.62,2.54) 9(10.16,0) 10(10.16,2.54) 11(12.7,0) 12(12.7,2.54) 13(15.24,0) 14(15.24,2.54) 15(17.78,0) 16(17.78,2.54) 17(20.32,0) 18(20.32,2.54) 19(22.86,0) 20(22.86,2.54) 21(25.4,0) 22(25.4,2.54) 23(27.94,0) 24(27.94,2.54) 25(30.48,0) 26(30.48,2.54) 27(33.02,0) 28(33.02,2.54) 29(35.56,0) 30(35.56,2.54) 31(38.1,0) 32(38.1,2.54) 33(40.64,0) 34(40.64,2.54) 35(43.18,0) 36(43.18,2.54) 37(45.72,0) 38(45.72,2.54) 39(48.26,0) 40(48.26,2.54)
  silkscreen extent -1.27,-1.27 49.53,3.81
PIN1 [mm] "Connector; Plug"
  rect 1.5x1.5 hole 0.9: 1(0,0)
  silkscreen extent -1.4,-1.4 1.4,2.17
S5 [mm] "SOT-23/SC-74A; 5 Leads; Body 3.1 x 3 mm, inc. leads (LxW max)"
  rect 0.55x1.45 smd: 1(-0.95,-1.075) 2(0,-1.075) 3(0.95,-1.075) 4(0.95,1.075) 5(-0.95,1.075)
  silkscreen extent -1.57,-1.35 1.55,0.9
SDHolder [mm] "SD card holder"
  rect 2.5x1 smd: 1(0,-2.5) 2(0,-5) 3(0,-7.5) 4(0,-10) 5(0,-12) 6(0,-15) 7(0,-17.43) 8(0,-19.12) 9(0,0) 12(0,3.78)
  round 2.5 hole 1.5: 10(24.75,2.72) 11(24.75,-21.48)
  rect 2.5x0.7 smd: 13(0,-20.62) 14(0,-21.62)
SMC [mm] "DO-214-AB/SMC; 2 C-Bend Leads; Body 7.9 x 5.9 mm, inc. leads (LxW)"
  rect 2.4x3.3 smd: 1(-3.475,0) 2(3.475,0)
  silkscreen extent -5.07,-2.05 5.43,2.05
SOIC127P1030X265-18N [mm] "SOIC, 18-Leads, Body 11,6x7,5mm (max), Pitch 1,27mm, IPC Medium Density"
  rect 2.3x0.6 smd: 1(-4.55,5.08) 2(-4.55,3.81) 3(-4.55,2.54) 4(-4.55,1.27) 5(-4.55,0) 6(-4.55,-1.27) 7(-4.55,-2.54) 8(-4.55,-3.81) 9(-4.55,-5.08) 10(4.55,-5.08) 11(4.55,-3.81) 12(4.55,-2.54) 13(4.55,-1.27) 14(4.55,0) 15(4.55,1.27) 16(4.55,2.54) 17(4.55,3.81) 18(4.55,5.08)
  silkscreen extent -4.67,-5.8 3,6.05, body extent -3.75,-5.77 3.75,5.77, height 2.65
SOIC150-8_N [mm] "SOIC, 8-Leads, Body 4.9x3.8mm, Pitch 1.27mm, IPC Medium Density"
  oval 1.8x0.6 smd: 1(-2.6,1.905) 2(-2.6,0.635) 3(-2.6,-0.635) 4(-2.6,-1.905) 5(2.6,-1.905) 6(2.6,-0.635) 7(2.6,0.635) 8(2.6,1.905)
  silkscreen extent -2.73,-2.5 1.3,2.88, body extent -2,-2.5 2,2.5, height 1.76
SOP8_N [mm] "SOIC, 8-Leads, Body 4.9x3.9mm, Pitch 1.27mm, IPC Medium Density"
  oval 2x0.6 smd: 1(-2.5,1.905) 2(-2.5,0.635) 3(-2.5,-0.635) 4(-2.5,-1.905) 5(2.5,-1.905) 6(2.5,-0.635) 7(2.5,0.635) 8(2.5,1.905)
  silkscreen extent -2.62,-2.5 1.1,2.88, body extent -2,-2.5 2,2.5, height 1.75
SOT23-6 [mm] "SOT-23/SC-74A; 5 Leads; Body 3.1 x 3 mm, inc. leads (LxW max)"
  rect 0.55x1.45 smd: 1(-0.95,-1.075) 2(0,-1.075) 3(0.95,-1.075) 4(0.95,1.075) 5(0,1.075) 6(-0.95,1.075)
  silkscreen extent -1.57,-1.35 1.55,0.9
TO263-5Lead [mm] "TO-263 5-Lead"
  rect 2.16x1.07 smd: 1(0,-3.4) 2(0,-1.7) 4(0,1.7) 5(0,3.4)
  rect 2.16x1.017 smd: 3(0,0)
  rect 7x10.8 smd: 6(-10.675,0)
TP1#1 [mm] "Test point n°1"
  round 1 smd: 1(0,0)
TP1#2 [mm] "Test point n°1"
  round 1 smd paste+0 mask+0.102: 1(-14.9,-17.4)
TP1#3 [mm] "Test point n°1"
  round 1 smd: 1(1.5,3.1)
TP1#4 [mm] "Test point n°1"
  round 1 smd: 1(-458.2,-20.125)
TQFP100_N [mm] "100-Pin Thin Quad Flat Pack 0.5 mm Pitch, IPC Medium Density"
  oval 1.8x0.3 smd: 1(-7.55,6) 2(-7.55,5.5) 3(-7.55,5) 4(-7.55,4.5) 5(-7.55,4) 6(-7.55,3.5) 7(-7.55,3) 8(-7.55,2.5) 9(-7.55,2) 10(-7.55,1.5) 11(-7.55,1) 12(-7.55,0.5) 13(-7.55,0) 14(-7.55,-0.5) 15(-7.55,-1) 16(-7.55,-1.5) 17(-7.55,-2) 18(-7.55,-2.5) 19(-7.55,-3) 20(-7.55,-3.5) 21(-7.55,-4) 22(-7.55,-4.5) 23(-7.55,-5) 24(-7.55,-5.5) 25(-7.55,-6) 51(7.55,-6) 52(7.55,-5.5) 53(7.55,-5) 54(7.55,-4.5) 55(7.55,-4) 56(7.55,-3.5) 57(7.55,-3) 58(7.55,-2.5) 59(7.55,-2) 60(7.55,-1.5) 61(7.55,-1) 62(7.55,-0.5) 63(7.55,0) 64(7.55,0.5) 65(7.55,1) 66(7.55,1.5) 67(7.55,2) 68(7.55,2.5) 69(7.55,3) 70(7.55,3.5) 71(7.55,4) 72(7.55,4.5) 73(7.55,5) 74(7.55,5.5) 75(7.55,6)
  oval 0.3x1.8 smd: 26(-6,-7.55) 27(-5.5,-7.55) 28(-5,-7.55) 29(-4.5,-7.55) 30(-4,-7.55) 31(-3.5,-7.55) 32(-3,-7.55) 33(-2.5,-7.55) 34(-2,-7.55) 35(-1.5,-7.55) 36(-1,-7.55) 37(-0.5,-7.55) 38(0,-7.55) 39(0.5,-7.55) 40(1,-7.55) 41(1.5,-7.55) 42(2,-7.55) 43(2.5,-7.55) 44(3,-7.55) 45(3.5,-7.55) 46(4,-7.55) 47(4.5,-7.55) 48(5,-7.55) 49(5.5,-7.55) 50(6,-7.55) 76(6,7.55) 77(5.5,7.55) 78(5,7.55) 79(4.5,7.55) 80(4,7.55) 81(3.5,7.55) 82(3,7.55) 83(2.5,7.55) 84(2,7.55) 85(1.5,7.55) 86(1,7.55) 87(0.5,7.55) 88(0,7.55) 89(-0.5,7.55) 90(-1,7.55) 91(-1.5,7.55) 92(-2,7.55) 93(-2.5,7.55) 94(-3,7.55) 95(-3.5,7.55) 96(-4,7.55) 97(-4.5,7.55) 98(-5,7.55) 99(-5.5,7.55) 100(-6,7.55)
  silkscreen extent -7.68,-6.25 6.25,6.82, body extent -7,-7 7,7, height 1.6
TQG144_N [mm] "Thin QFP, 144-Leads, Body 20x20mm, Pitch 0.5mm, IPC Medium Density"
  oval 1.8x0.3 smd: 1(-10.55,8.75) 2(-10.55,8.25) 3(-10.55,7.75) 4(-10.55,7.25) 5(-10.55,6.75) 6(-10.55,6.25) 7(-10.55,5.75) 8(-10.55,5.25) 9(-10.55,4.75) 10(-10.55,4.25) 11(-10.55,3.75) 12(-10.55,3.25) 13(-10.55,2.75) 14(-10.55,2.25) 15(-10.55,1.75) 16(-10.55,1.25) 17(-10.55,0.75) 18(-10.55,0.25) 19(-10.55,-0.25) 20(-10.55,-0.75) 21(-10.55,-1.25) 22(-10.55,-1.75) 23(-10.55,-2.25) 24(-10.55,-2.75) 25(-10.55,-3.25) 26(-10.55,-3.75) 27(-10.55,-4.25) 28(-10.55,-4.75) 29(-10.55,-5.25) 30(-10.55,-5.75) 31(-10.55,-6.25) 32(-10.55,-6.75) 33(-10.55,-7.25) 34(-10.55,-7.75) 35(-10.55,-8.25) 36(-10.55,-8.75) 73(10.55,-8.75) 74(10.55,-8.25) 75(10.55,-7.75) 76(10.55,-7.25) 77(10.55,-6.75) 78(10.55,-6.25) 79(10.55,-5.75) 80(10.55,-5.25) 81(10.55,-4.75) 82(10.55,-4.25) 83(10.55,-3.75) 84(10.55,-3.25) 85(10.55,-2.75) 86(10.55,-2.25) 87(10.55,-1.75) 88(10.55,-1.25) 89(10.55,-0.75) 90(10.55,-0.25) 91(10.55,0.25) 92(10.55,0.75) 93(10.55,1.25) 94(10.55,1.75) 95(10.55,2.25) 96(10.55,2.75) 97(10.55,3.25) 98(10.55,3.75) 99(10.55,4.25) 100(10.55,4.75) 101(10.55,5.25) 102(10.55,5.75) 103(10.55,6.25) 104(10.55,6.75) 105(10.55,7.25) 106(10.55,7.75) 107(10.55,8.25) 108(10.55,8.75)
  oval 0.3x1.8 smd: 37(-8.75,-10.55) 38(-8.25,-10.55) 39(-7.75,-10.55) 40(-7.25,-10.55) 41(-6.75,-10.55) 42(-6.25,-10.55) 43(-5.75,-10.55) 44(-5.25,-10.55) 45(-4.75,-10.55) 46(-4.25,-10.55) 47(-3.75,-10.55) 48(-3.25,-10.55) 49(-2.75,-10.55) 50(-2.25,-10.55) 51(-1.75,-10.55) 52(-1.25,-10.55) 53(-0.75,-10.55) 54(-0.25,-10.55) 55(0.25,-10.55) 56(0.75,-10.55) 57(1.25,-10.55) 58(1.75,-10.55) 59(2.25,-10.55) 60(2.75,-10.55) 61(3.25,-10.55) 62(3.75,-10.55) 63(4.25,-10.55) 64(4.75,-10.55) 65(5.25,-10.55) 66(5.75,-10.55) 67(6.25,-10.55) 68(6.75,-10.55) 69(7.25,-10.55) 70(7.75,-10.55) 71(8.25,-10.55) 72(8.75,-10.55) 109(8.75,10.55) 110(8.25,10.55) 111(7.75,10.55) 112(7.25,10.55) 113(6.75,10.55) 114(6.25,10.55) 115(5.75,10.55) 116(5.25,10.55) 117(4.75,10.55) 118(4.25,10.55) 119(3.75,10.55) 120(3.25,10.55) 121(2.75,10.55) 122(2.25,10.55) 123(1.75,10.55) 124(1.25,10.55) 125(0.75,10.55) 126(0.25,10.55) 127(-0.25,10.55) 128(-0.75,10.55) 129(-1.25,10.55) 130(-1.75,10.55) 131(-2.25,10.55) 132(-2.75,10.55) 133(-3.25,10.55) 134(-3.75,10.55) 135(-4.25,10.55) 136(-4.75,10.55) 137(-5.25,10.55) 138(-5.75,10.55) 139(-6.25,10.55) 140(-6.75,10.55) 141(-7.25,10.55) 142(-7.75,10.55) 143(-8.25,10.55) 144(-8.75,10.55)
  silkscreen extent -10.67,-9.25 9.25,9.57, body extent -10,-10 10,10, height 1.6
USB [mm] "Embase femelle USB serie B"
  rect 2.3x0.5 smd: 1(0,1.6) 2(0,0.8) 3(0,0) 4(0,-0.8) 5(0,-1.6)
  rect 2.5x2 smd: MH1(0,-4.445) MH2(0,4.45) MH3(-6.75,-4.45) MH4(-6.75,4.45)

## Part data
ALIM CANBUS I2C: library part "Header 4", "Header, 4-Pin"
C101 C201 C202 C203 C204 C205 C206 C207 C209 C210 C211 C212 C213 C214 C215 C216 C217 C301 C302 C303 C304 C305 C306 C307 C308 C309 C310 C311 C312 C313 C314 C315 C316 C319 C320 C321 C401 C402 C405 C406 C407 C408 C410 C411 C501 C502 C503 C504 C505 C506 C507 C509 C510: library part Cap, "Capacitor"
C317 C318 C409: library part Cap2, "Capacitor"
CODEUR1 CODEUR2 MOTEUR1 MOTEUR2: "Header, 4-Pin"
D201 D202 D203 D301 D302 D404: library part LED0, "LED SML-311DTT86"
D204 D401: library part BZX84C5V6LT1, "Zener Voltage Regulator Diode"
D402 D403: library part Diode, "SCHOTTKY 3A DIODE"
D501: "High Conductance Fast Diode 0603 case"
"IN SITU": library part MHDR1X5, "Header, 5-Pin"
JTAG: "Header, 6-Pin"
L401 L402: library part Inductor, "Inductor"
P1 P2 P3 P4 P5 P6 P7 P8 P9 P10 P11 P12 P13 P14 P15 P16 P17 P18 P19 P20 P21: library part Plug, "Plug"
PORT1 PORT2: library part MHDR2X20, "Header, 20-Pin, Dual row"
R201 R202 R203 R204 R205 R206 R207 R208 R209 R210 R211 R212 R213 R214 R215 R216 R301 R302 R303 R304 R305 R306 R308 R309 R310 R311 R312 R313 R314 R315 R316 R317 R318 R319 R320 R401 R402 R404 R405 R407 R408 R501 R502 R503 R504 R505 R506: library part Res2, "Resistor"
S201 S202 S203 S301: "Switch"
SD_CARD: "SD Card Holder"
U101: "Octal Buffer/Driver with 3-State Outputs"
U201: "PIC32"
U202: library part M24C16MN6, "16Kbit Serial I²C Bus EEPROM"
U301: "Spartan-3AN Non-Volatile FPGA, 108 User I/Os, 144-Pin TQFP, Standard Performance, Commercial Grade, Pb-Free"
U302: "17MHz to 170MHz Resistor Set SOT-23 Oscillator"
U401: library part LM2830, "High Frequency 1.0A Load - Step-Down DC-DC Regulator"
U402: library part LP38858, "1.5A Fast-Reponse High-Accuracy LDO Linear Regulator with Soft-Start"
U501: "I2C bus repeater"
U502: "High Speed Can Transceiver"
U503: "Stand Alone CAN Controller With SPI Interface"
U504: "Very low capacitance ESD protection"
USB: "USB On-The-Go (OTG) Mini-B Receptacle, Right Angle, SMT, 0.80mm (.031\") Pitch, Solder Tabs with Back Cover, Recessed Type"
Y501: library part XTAL, "Crystal Oscillator"

## Free pads (board coordinates)
  round 6 hole 3.1: 0(-17,1.27) 1(-17,72) 2(74,1.27) 3(74,72)

## Via types
v1: diameter 0.7, hole 0.35, Top Layer to Bottom Layer, 202 vias
v2: diameter 1.27, hole 0.711, Top Layer to Bottom Layer, 37 vias
v3: diameter 1, hole 0.35, Top Layer to Bottom Layer, 5 vias
v4: diameter 0.75, hole 0.35, Top Layer to Bottom Layer, 3 vias
v5: diameter 0.73, hole 0.35, Top Layer to Bottom Layer, 2 vias
v6: diameter 0.7, hole 0.35, Top Layer to Bottom Layer, tented bottom, 1 vias

## Nets (pads, with @x,y where several pads share a name; then routed paths per layer and width w, separated by ;. In a path a pad name is that pad's centre, name@x,y a point inside that pad or via, vN(x,y) a via of type N, cw(c..) or ccw(c..) an arc to the next point about the centre after c; other vN are vias at no path point)
+1V2: C313.2 C314.2 C315.2 C316.2 C318.1 C409.1 C410.2 P5.1 U301.22 U301.52 U301.94 U301.122 U402.4 | length 76.8
  Top Layer w0.254: U301.22@26.95,20.79 28.65,20.79 v1(29,21.14) ; v1(34.2,20.8) 34.2,20.2 36.25,18.15 U301.52@36.25,11.99 36.25,9.24 C314.2@36.3,9.19 36.05,9.19 35,8.14 P5.1@35,5.64 ; C316.2@39.6,35.69 39.75,35.54 U301.122@39.75,33.09 v1@39.75,31.49 ; v1(46.1,23.64) 46.75,24.29 U301.94@48.05,24.29 50.05,24.29 C315.2@51,23.34
  MidLayer2 w0.254: 33.14,20.8 v1(34.2,20.8)
  MidLayer2 w0.508: v1(32,21.94) 33.14,20.8 34.2,19.74 36.5,19.74 36.9,20.14 36.9,26.14 39.7,28.94 v1(39.7,31.44)
  MidLayer2 w1.016: v1(39.7,31.44) 41.8,31.44 46.1,27.14 v1(46.1,23.64)
  Bottom Layer w0.254: C409.1@-3.9,27.34 -2,27.34 -2,26.34 -0.8,25.14 ; v1(29,21.14) 30.25,21.14 C313.2@30.3,21.19 31.25,21.19 v1(32,21.94)
  Bottom Layer w0.508: U402.4@-0.8,23.84 -0.8,25.14
  Bottom Layer w1.016: v1(46.1,23.64) 50.26,27.8 C318.1@52,27.8
  other v1: -12.5,24.34 -12.5,25.54 -12.5,26.74 -12.5,28.04
+3V3: "IN SITU.2" C101.1 C201.2 C202.2 C203.2 C205.1 C206.2 C210.1 C211.1 C212.2 C213.2 C215.1 C301.2 C302.2 C303.2 C304.2 C305.2 C306.2 C307.2 C308.2 C309.2 C310.2 C311.2 C312.2 C317.1 C319.1 C405.2 C406.2 C407.2 C504.1 C506.1 C510.2 D404.1 D501.2 JTAG.6 L402.2 P4.1 R201.2 R202.2 R204.2 R205.2 R207.2 R208.2 R211.2 R212.2 R215.2 R216.2 R301.2 R302.2 R303.2 R304.2 R311.1 R312.1 R313.1 R314.1 R315.1 R316.2 R404.2 R505.2 SD_CARD.4 U101.20 U201.2 U201.16 U201.30 U201.37 U201.46 U201.55 U201.62 U201.86 U202.8 U301.14 U301.23 U301.36 U301.40 U301.61 U301.66 U301.86 U301.95 U301.108 U301.119 U301.133 U301.136 U302.1 U402.2 U402.5 U501.5 U501.8 U503.18 | length 597.6
  Top Layer w0.254: U503.18@-3.98,57.79 -3.98,60.52 -2.5,62 R505.2@-1.25,62 ; v1(-3.9,21.54) -3.9,23.04 -2.65,23.04 C407.2@-2.6,23.09 ; v1@9.2,35.44 v1(9.25,35.49) R311.1@11.1,35.49 R312.1@12.7,35.49 R313.1@14.2,35.49 R314.1@15.8,35.49 ; v2(9.3,26.54) 9.3,25.64 9.9,25.04 9.9,19.04 9.5,18.64 D404.1@9.5,17.84 ; C309.2@24.4,13.29 25.15,13.29 25.65,13.79 U301.36@26.95,13.79 29.75,13.79 v1@30.25,14.29 ; C308.2@24.4,20.19 24.5,20.29 U301.23@26.95,20.29 30.25,20.29 ; C307.2@24.4,23.99 25.15,23.99 25.95,24.79 U301.14@26.95,24.79 28.75,24.79 v1(28.8,24.74) 30.25,23.29 30.25,20.29 ; C205.1@26.8,54.04 v1(28.2,54.04) U201.62@29.95,54.04 31.2,54.04 31.4,54.24 31.4,56.94 32,57.54 ; C211.1@26.8,57.54 U201.55@29.95,57.54 32,57.54 ; U301.40@30.25,11.99 v1@30.25,14.29 ; v1@31,35.64 v1(31.05,35.69) ; v1(31.4,19.14) 30.25,20.29 ; U301.136@32.75,33.09 32.75,35.64 C312.2@32.8,35.69 ; C203.2@33.5,64.09 U201.46@33.5,61.09 33.5,60.04 33.1,59.64 33.1,58.64 v1(32.8,58.34) ; C302.2@34.3,35.69 34.25,35.64 U301.133@34.25,33.09 34.25,31.59 35.3,30.54 40.3,30.54 41.25,31.49 U301.119@41.25,33.09 41.25,35.54 C301.2@41.1,35.69 ; C210.1@36.5,43.74 U201.86@36.5,45.99 ; U301.61@40.75,11.99 40.75,9.24 C306.2@40.7,9.19 v1(42,9.19) C310.2@43.3,9.19 43.25,9.24 U301.66@43.25,11.99 ; U201.30@41.5,61.09 C206.2@41.5,64.94 40.34,64.94 v1(40.183,64.783) 39.49,64.09 C202.2@38,64.09 U201.37@38,61.09 38,59.7 35.4,57.1 34.04,57.1 v1(32.8,58.34) ; v1(42.2,48.24) 42.4,48.04 U201.2@45.05,48.04 ; v1(44.7,6.04) 45.9,6.04 46.5,6.64 R316.2@46.5,7.49 ; U201.16@45.05,55.04 C201.2@48.15,55.04 ; v1(45.1,20.24) v1@45.15,20.29 ; U301.108@48.05,31.29 51.25,31.29 C311.2@51.3,31.34 51.3,32.94 ; C201.2@48.15,54.9 48.15,55.85 48.3,56 v1(48.7,56) ; C201.2@48.45,54.9 48.6,54.75 48.6,54.04 51,54.04 51.2,54.24 51.2,57.44 50.5,58.14 R202.2@50.5,59.89 ; v1(49.3,40.84) R207.2@49.3,42.09 ; C303.2@51.15,20.34 51.15,19.59 51.5,19.24 53.9,19.24 54.2,19.54 54.2,20.14 55.185,21.125 U101.20@57.05,21.125 C101.1@57.05,19.14 ; C303.2@51.15,20.54 50.9,20.29 U301.86@48.05,20.29 v1@45.15,20.29 ; C304.2@51.3,24.84 51.25,24.79 U301.95@48.05,24.79 45.75,24.79 45.15,24.19 v1@45.15,20.29 ; v1@30.25,14.29 v1(30.3,14.34) v1@30.25,14.29 ; 32,57.54 v1(32.8,58.34)
  Top Layer w0.508: C504.1@-6.1,57.79 U503.18@-3.98,57.79 -3.98,55.92 0.04,51.9 8.1,51.9 ; D501.2@8.1,57.25 8.1,51.9 ; R201.2@16.4,46.69 16.4,47.58 15.04,47.58 v1@18.295,50.835 ; v1@18.295,50.84 U202.8@18.295,52.94 17.75,52.94 17.3,53.39 C215.1@16.6,53.39 15.45,53.39 14.9,53.94 12,53.94 10,51.94 8.14,51.94 8.1,51.9 ; C210.1@36.5,43.69 37.35,43.69 v1(37.8,44.14) ; v1(50.55,33.69) 51.3,32.94 52.94,32.94 53.9,33.9 62.6,33.9 64.6,35.9 R215.2@64.6,39.85 64.65,39.8 65.8,39.8 65.8,42.5 63.7,44.6 63.7,55.1 54.6,64.2 54.6,68.8 53.95,69.45 R216.2@52.8,69.45 ; v1(53.4,54.9) 55.1,54.9 55.6,55.4 C213.2@55.6,56.55
  Top Layer w1.016: v1(30.3,14.34) 31.4,15.44 v1(31.4,19.14) 31.4,19.64 34.4,22.64 37.4,22.64 39.8,20.24 v1(45.1,20.24) ; v1(31.05,35.69) C312.2@32.8,35.69 C302.2@34.3,35.69 ; v1(50.55,33.69) R208.2@50.55,35.84
  MidLayer2 w0.254: v1(42.2,48.24) 43.4,48.24 45.7,50.54 45.7,56.04 46.2,56.54 47.2,56.54 47.74,56 v1(48.7,56)
  MidLayer2 w0.508: v2(9.3,26.54) 9.3,24.44 10.7,23.04 11.65,23.04 JTAG.6@16.1,18.59 ; v1(37.8,44.14) 41.9,48.24 v1(42.2,48.24) ; v1(49.3,40.84) 46.76,40.84 45.3,42.3 45.3,46 48,48.7 48,50.7 49.2,51.9 50.4,51.9 v1(53.4,54.9)
  MidLayer2 w0.708: 30.9,54.44 33,54.44 ; 32.4,56.44 33.5,55.34
  MidLayer2 w1.016: v2(8.1,27.94) 8.1,34.34 v1(9.25,35.49) ; v1@25.45,51.44 22.9,51.44 22.3,50.84 v1(18.3,50.84) 15.04,47.58 13.4,47.58 11.64,47.58 11,46.94 11,37.24 v1(9.25,35.49) ; v1(28.2,54.04) 30.5,54.04 30.9,54.44 ; v1(31.05,35.69) 30.1,36.64 22.8,36.64 21.65,35.49 ; v1(31.4,19.14) 30.2,20.34 30.2,23.34 v1(28.8,24.74) 21.65,31.89 21.65,35.49 ; 32.4,56.44 32.4,57.94 v1(32.8,58.34) ; 33,54.44 33.5,54.94 33.5,55.34 ; v1(45.1,20.24) 50.55,25.69 v1(50.55,33.69) 50.55,39.59 v1(49.3,40.84) ; v1(9.25,35.49) 21.65,35.49
  Bottom Layer w0.254: U402.2@-4.2,23.84 -4.2,21.84 v1(-3.9,21.54) ; v2(0.6,26.64) 0.6,25.74 0.9,25.44 ; 13.4,47.58 14.96,47.58 15.3,47.24 15.3,41.04 16.7,39.64 24.2,39.64 24.595,40.035 U501.8@24.595,41.89 23.645,40.94 C506.1@22.45,40.94 ; R303.2@16.9,4.49 17.7,4.49 R302.2@19.5,6.29 ; v1(18.3,50.84) 20.65,50.84 R212.2@20.7,50.89 R211.2@22.3,50.89 ; 20.76,6.5 22.2,7.94 R301.2@22.2,9.09 ; v1(30.3,14.34) C305.2@30.3,15.99 ; C510.2@30.5,41.89 U501.5@28.405,41.89 28.405,38.335 v1(31.05,35.69) ; C319.1@37.5,20.04 C319.1@37.5,20.19 37.5,19.14 37.8,18.84 38.7,18.84 38.75,18.79 38.75,18.39 ; C212.2@40.5,48.69 41.75,48.69 v1(42.2,48.24) ; R304.2@43,11.99 43,10.19 v1(42,9.19) 44.7,6.49 v1(44.7,6.04) ; R315.1@43.1,20.19 v1@45.05,20.19
  Bottom Layer w0.508: U402.5@0.9,23.84 0.9,25.44 ; R302.2@19.5,6.29 19.71,6.5 20.76,6.5 44.24,6.5 v1(44.7,6.04) 45.84,6.04 46.2,6.4 C317.1@46.2,8 ; R205.2@24.2,51.39 v1(25.5,51.39) ; v1@25.55,51.39 R204.2@29.2,51.39 30.15,51.39 31.1,50.44 31.1,46.44 29.8,45.14 29.8,44.44 30.4,43.84 37.5,43.84 v1(37.8,44.14) ; v1(53.4,54.9) 53.8,54.5 SD_CARD.4@55.6,54.5
  Bottom Layer w1.016: v1@25.55,51.39 v1(28.2,54.04) ; v1(31.4,19.14) 35.5,19.14 37.025,17.615 U302.1@38.5,17.615
  other v1: 15.1,47.59
+5V: ALIM.2 ALIM.3 C501.1 C507.2 CANBUS.2 CODEUR1.4 CODEUR2.4 D402.2 I2C.2 L401.1 P1.1 PORT1.39 PORT1.40 PORT2.1 PORT2.2 R407.2 R503.2 R504.2 U502.3 | length 180.6
  Top Layer w0.254: C507.2@5.3,39.35 C507.2@5.4,39.45
  Top Layer w0.508: v1(3.3,39.94) 3.3,38.64 4.3,37.64 v1(5.3,37.64) C507.2@5.3,39.35
  MidLayer2 w1.016: ALIM.3@-10,14.96 -7.96,14.96 0,7 15.9,7 18,4.9 v1(36.5,4.9) v1(37.9,4.9) ; CANBUS.2@-10,32.5 -11.26,32.5 -11.9,33.14 -11.9,46.74 -11.14,47.5 I2C.2@-10,47.5 -7.7,47.5 0,55.2 PORT2.2@0,71.12 PORT2.1@0,73.66 ; v1(43,4.9) v1(44,4.9) 47.6,4.9 48.26,4.24 PORT1.39@48.26,2.54 ; PORT1.40@48.26,0 PORT1.39@48.26,2.54 ; CODEUR2.4@76,14.72 CODEUR1.4@69.9,14.72 68.52,14.72 65.8,12 65.8,9.5 58.84,2.54 PORT1.39@48.26,2.54
  Bottom Layer w0.254: I2C.2@-10,47.5 -0.76,47.5 0,46.74 0,41.34 0.2,41.14 1.365,41.14 U502.3@1.4,41.105 ; C501.1@4.315,41.105 C501.1@4.35,41.14 4.35,40.29 4.7,39.94 6.9,39.94 7.2,40.24 R503.2@8.25,40.24
  Bottom Layer w0.508: U502.3@1.4,41.105 3.3,41.105 ; v1(3.3,39.94) 3.3,41.105 ; C501.1@4.315,41.105 3.3,41.105 ; v1(5.3,37.64) R504.2@8.25,37.64
FPGA_CLK: P21.1 U301.57 U302.5 | length 6.2
  Top Layer w0.254: P21.1@38.7,9.34 38.75,9.39 U301.57@38.75,11.99 v1@38.75,13.94
  Bottom Layer w0.254: v1(38.7,13.94) 38.75,13.99 U302.5@38.75,15.465
FPGA_GPIO_0: PORT1.13 U301.41 | length 20.6
  Top Layer w0.254: PORT1.13@15.24,2.54 18.24,5.54 20.3,5.54 24.2,9.44 30.2,9.44 30.75,9.99 U301.41@30.75,11.99
FPGA_GPIO_1: PORT1.14 U301.42 | length 23.2
  Top Layer w0.254: PORT1.14@15.24,0 16.5,1.26 16.5,3.04 18.5,5.04 20.5,5.04 24.45,8.99 30.35,8.99 31.25,9.89 U301.42@31.25,11.99
FPGA_GPIO_2: PORT1.15 U301.43 | length 19.2
  Top Layer w0.254: PORT1.15@17.78,2.54 19.78,4.54 20.7,4.54 24.7,8.54 30.5,8.54 31.75,9.79 U301.43@31.75,11.99
FPGA_GPIO_3: PORT1.16 U301.44 | length 21.7
  Top Layer w0.254: PORT1.16@17.78,0 19,1.22 19,2.84 20.2,4.04 21,4.04 25,8.04 30.6,8.04 32.25,9.69 U301.44@32.25,11.99
FPGA_GPIO_4: PORT1.17 U301.45 | length 17.8
  Top Layer w0.254: PORT1.17@20.32,2.54 25.326,7.546 30.706,7.546 32.75,9.59 U301.45@32.75,11.99
FPGA_GPIO_5: PORT1.18 U301.46 | length 20.4
  Top Layer w0.254: PORT1.18@20.32,0 21.6,1.28 21.6,3.04 25.7,7.14 30.9,7.14 33.25,9.49 U301.46@33.25,11.99
FPGA_GPIO_6: PORT1.19 U301.47 | length 16.9
  Top Layer w0.254: PORT1.19@22.86,2.54 22.86,3.6 25.994,6.734 31.094,6.734 33.75,9.39 U301.47@33.75,11.99
FPGA_GPIO_7: PORT1.20 U301.48 | length 19.6
  Top Layer w0.254: PORT1.20@22.86,0 24.1,1.24 24.1,4.14 26.288,6.328 31.288,6.328 34.25,9.29 U301.48@34.25,11.99
FPGA_GPIO_8: PORT1.21 U301.49 | length 16.2
  Top Layer w0.254: PORT1.21@25.4,2.54 25.4,4.74 26.581,5.921 31.481,5.921 34.75,9.19 U301.49@34.75,11.99
FPGA_GPIO_9: PORT1.22 U301.50 | length 18.8
  Top Layer w0.254: PORT1.22@25.4,0 26.7,1.3 26.7,5.14 27,5.44 31.6,5.44 35.25,9.09 U301.50@35.25,11.99
FPGA_JTAG_TCK: JTAG.4 R311.2 U301.109 | length 47.8
  Top Layer w0.254: R311.2@11.1,33.79 11.1,32.64 13.3,30.44 13.3,26.44 JTAG.4@15.66,24.08 ; v1(38.9,29.64) 39.34,29.2 41.26,29.2 43.3,31.24 46,31.24 46.3,31.54 46.3,33.04 U301.109@46.25,33.09
  Bottom Layer w0.254: JTAG.4@16.1,23.62 17.28,23.62 19.2,25.54 36.1,25.54 38.9,28.34 v1(38.9,29.64)
FPGA_JTAG_TDI: JTAG.2 R313.2 U301.2 | length 17.6
  Top Layer w0.254: R313.2@14.2,33.79 14.2,32.74 14.6,32.34 14.6,30.25 JTAG.2@16.1,28.75 16.15,28.7 19.66,28.7 21.75,30.79 U301.2@26.95,30.79
FPGA_JTAG_TDO: JTAG.3 R312.2 U301.107 | length 43.5
  Top Layer w0.254: R312.2@12.7,33.79 12.7,33.04 14,31.74 14,27.36 15.2,26.16 16.05,26.16 JTAG.3@16.1,26.21 ; v1(38.1,28.64) 41.6,28.64 43.75,30.79 U301.107@48.05,30.79
  Bottom Layer w0.254: JTAG.3@16.1,26.16 35.62,26.16 v1(38.1,28.64)
FPGA_JTAG_TMS: JTAG.1 R314.2 U301.1 | length 13.5
  Top Layer w0.254: R314.2@15.8,33.79 15.8,31.59 JTAG.1@16.1,31.29 U301.1@26.95,31.29
FPGA_PHA1: PORT1.37 U101.18 U301.102 | length 41.5
  Top Layer w0.254: PORT1.37@45.72,2.54 45.72,4.26 59.9,18.44 59.9,23.24 59.475,23.665 U101.18@57.05,23.665 55.475,23.665 54.6,24.54 54.6,26.24 52.55,28.29 U301.102@48.05,28.29
FPGA_PHA2: PORT1.35 U101.14 U301.104 | length 49.5
  Top Layer w0.254: U301.104@48.05,29.29 48.1,29.34 53,29.34 53.595,28.745 U101.14@57.05,28.745 57.055,28.74 v1(59.2,28.74)
  Bottom Layer w0.254: PORT1.35@43.18,2.54 43.18,2.98 45.6,5.4 50,5.4 50.5,5.9 54.1,5.9 59.9,11.7 59.9,28.04 v1(59.2,28.74)
FPGA_PHA3: PORT1.33 U301.101 | length 31.5
  Top Layer w0.254: v1(42.6,27.74) 42.65,27.79 U301.101@48.05,27.79
  MidLayer2 w0.254: PORT1.33@40.64,2.54 40.64,25.78 v1(42.6,27.74)
FPGA_PHA4: PORT1.31 U301.98 | length 34.4
  Top Layer w0.254: v1(38.1,25.94) 44.3,25.94 44.65,26.29 U301.98@48.05,26.29
  MidLayer2 w0.254: PORT1.31@38.1,2.54 38.1,3.6 38.8,4.3 38.8,9.24 37.7,10.34 37.7,25.54 v1(38.1,25.94)
FPGA_PHB1: PORT1.38 U101.16 U301.103 | length 45.5
  Top Layer w0.254: PORT1.38@45.72,0 47.1,1.38 47.1,4.94 60.5,18.34 60.5,25.54 59.8,26.24 57.085,26.24 U101.16@57.05,26.205 55.335,26.205 52.75,28.79 U301.103@48.05,28.79
FPGA_PHB2: P19.1 PORT1.36 U101.12 U301.105 | length 59.8
  Top Layer w0.254: U301.105@48.05,29.79 53.25,29.79 54.745,31.285 U101.12@57.05,31.285 58.855,31.285 v1(59.9,30.24) ; P19.1@60.5,16.04 62,17.54 v1(62,18.24)
  Bottom Layer w0.254: PORT1.36@43.18,0 44.5,1.32 44.5,3.4 45.7,4.6 50.1,4.6 50.5,4.2 53.5,4.2 62,12.7 v1(62,18.24) 60.5,19.74 60.5,29.64 v1(59.9,30.24)
FPGA_PHB3: PORT1.34 U301.99 | length 32.3
  Top Layer w0.254: v1(43.8,26.74) 43.85,26.79 U301.99@48.05,26.79
  MidLayer2 w0.254: PORT1.34@40.64,0 42,1.36 42,5.6 43,6.6 43,25.94 v1(43.8,26.74)
FPGA_PHB4: PORT1.32 U301.96 | length 34.4
  Top Layer w0.254: v1(39.4,25.24) 39.45,25.29 U301.96@48.05,25.29
  MidLayer2 w0.254: PORT1.32@38.1,0 39.4,1.3 v1(39.4,25.24)
FPGA_RESET: C321.2 R316.1 R320.1 S301.3 U301.70 | length 49.6
  Top Layer w0.254: v1(24.2,35.24) R320.1@25.55,35.24 ; v1(35.8,20.84) 41,15.64 43,15.64 45.25,13.39 U301.70@45.25,11.99 45.25,10.69 44.8,10.24 C321.2@44.8,9.19 R316.1@46.5,9.19 48.05,9.19 v1(48.1,9.14) ; v1(51,5.04) 52.25,3.79 S301.3@54,3.79
  MidLayer2 w0.254: v1(24.2,35.24) 24.2,32.44 v1(35.8,20.84) ; v1(48.1,9.14) 48.1,7.94 v1(51,5.04)
FPGA_SERVO_0: PORT1.3 U301.3 | length 43.5
  Top Layer w0.254: PORT1.3@2.54,2.54 2.54,4.68 3.1,5.24 7.8,5.24 18.7,16.14 18.7,27.04 21.95,30.29 U301.3@26.95,30.29
FPGA_SERVO_1: PORT1.4 U301.4 | length 44.9
  Top Layer w0.254: PORT1.4@2.54,0 3.8,1.26 3.8,4.34 4.2,4.74 8,4.74 19.2,15.94 19.2,26.84 22.15,29.79 U301.4@26.95,29.79
FPGA_SERVO_2: PORT1.5 U301.5 | length 40.2
  Top Layer w0.254: PORT1.5@5.08,2.54 5.08,4.02 5.3,4.24 8.2,4.24 19.7,15.74 19.7,26.64 22.35,29.29 U301.5@26.95,29.29
FPGA_SERVO_3: PORT1.6 U301.6 | length 41.5
  Top Layer w0.254: PORT1.6@5.08,0 6.3,1.22 6.3,3.44 6.6,3.74 8.4,3.74 20.2,15.54 20.2,26.44 22.55,28.79 U301.6@26.95,28.79
FPGA_SERVO_4: PORT1.7 U301.7 | length 37
  Top Layer w0.254: PORT1.7@8.2,2.54 PORT1.7@7.62,2.54 8.32,3.24 8.6,3.24 20.7,15.34 20.7,26.24 22.75,28.29 U301.7@26.95,28.29
FPGA_SERVO_5: PORT1.8 U301.8 | length 38.1
  Top Layer w0.254: PORT1.8@7.62,0 8.9,1.28 8.9,2.84 21.2,15.14 21.2,26.04 22.95,27.79 U301.8@26.95,27.79
FPGA_SERVO_6: PORT1.9 U301.10 | length 33.7
  Top Layer w0.254: PORT1.9@10.16,2.54 10.16,3.4 21.7,14.94 21.7,25.84 22.65,26.79 U301.10@26.95,26.79
FPGA_SERVO_7: PORT1.10 U301.11 | length 35.6
  Top Layer w0.254: PORT1.10@10.16,0 11.5,1.34 11.5,3.94 22.2,14.64 22.2,25.54 22.95,26.29 U301.11@26.95,26.29
FPGA_SERVO_8: PORT1.11 U301.12 | length 31.4
  Top Layer w0.254: PORT1.11@12.7,2.54 12.7,4.44 22.7,14.44 22.7,25.34 23.1,25.74 26.9,25.74 U301.12@26.95,25.79
FPGA_SERVO_9: PORT1.12 U301.13 | length 33.2
  Top Layer w0.254: PORT1.12@12.7,0 13.9,1.2 13.9,4.94 23.2,14.24 23.2,24.94 23.55,25.29 U301.13@26.95,25.29